# Altium PCB Board4layer.PcbDoc (part 1 of 2)
Units mm, origin at the board's own origin, x right, y up, seen from the top; angles counter-clockwise.
Board outline 136 x 96 mm, 4 copper layers (Top Layer, Int1 (GND), Int2 (PWR), Bottom Layer), stack 1.369 mm thick; 242 components, 241 nets, 1041 pads, 277 vias.
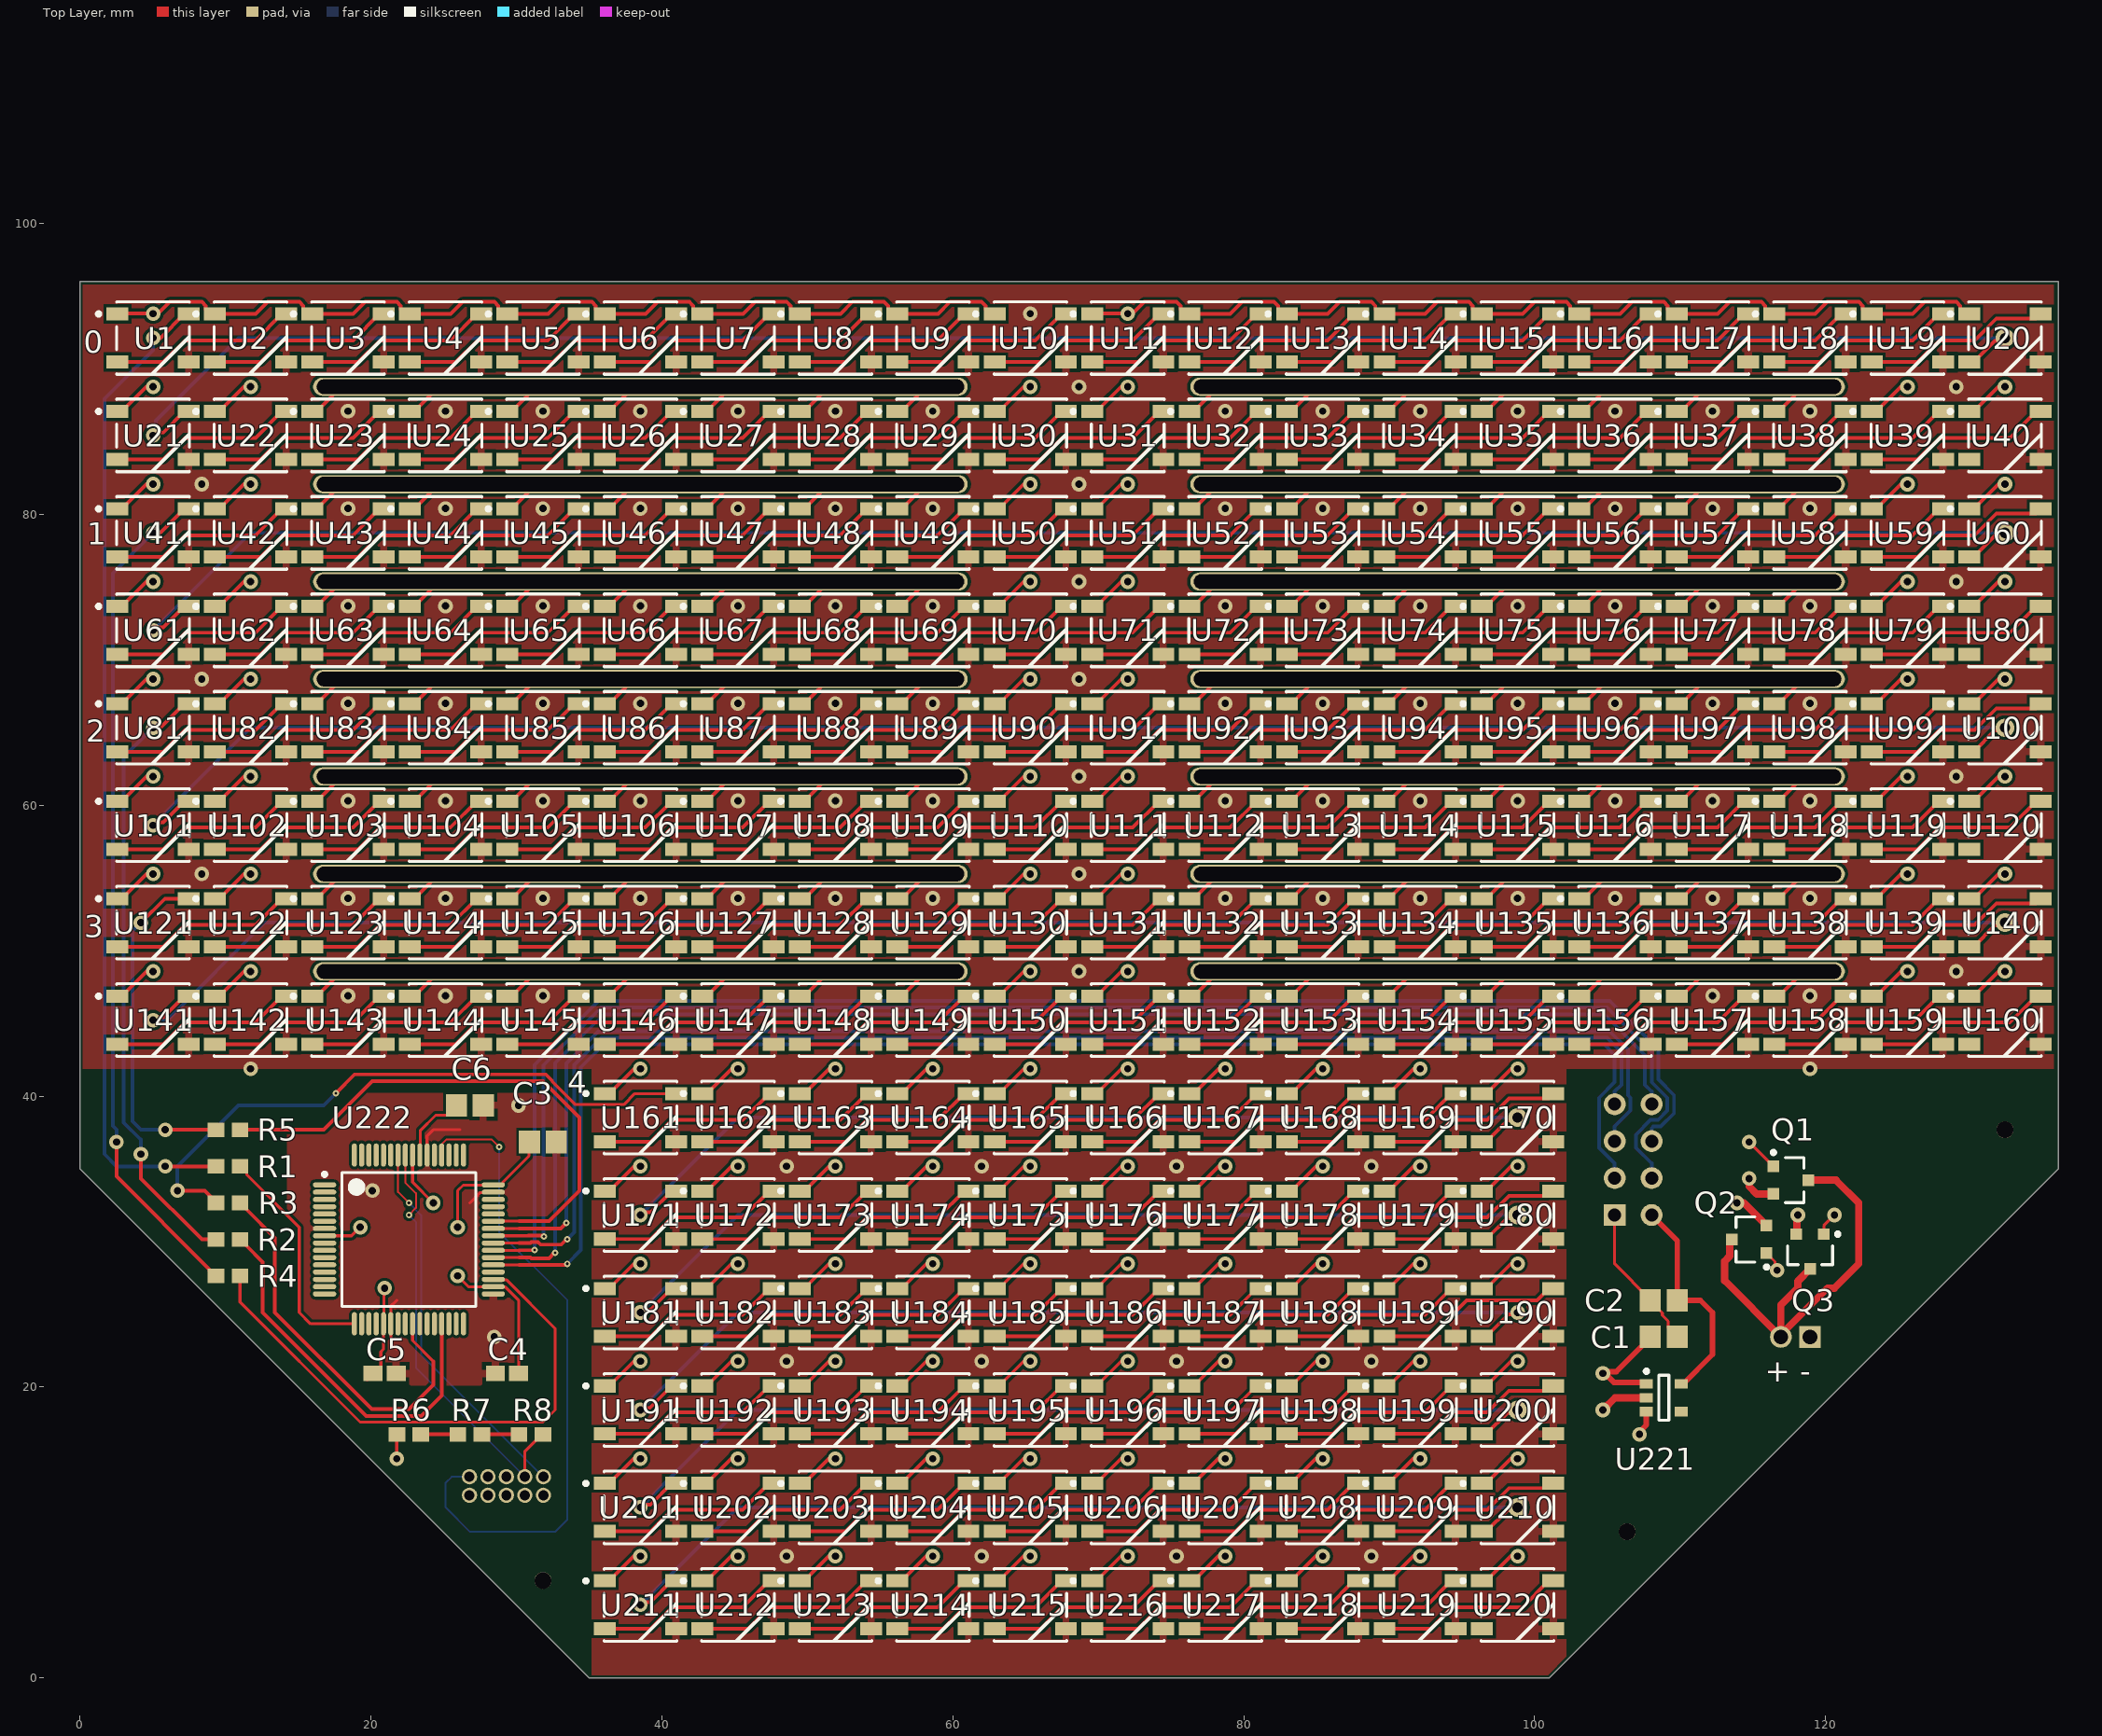
[diagram p0: Top Layer view]
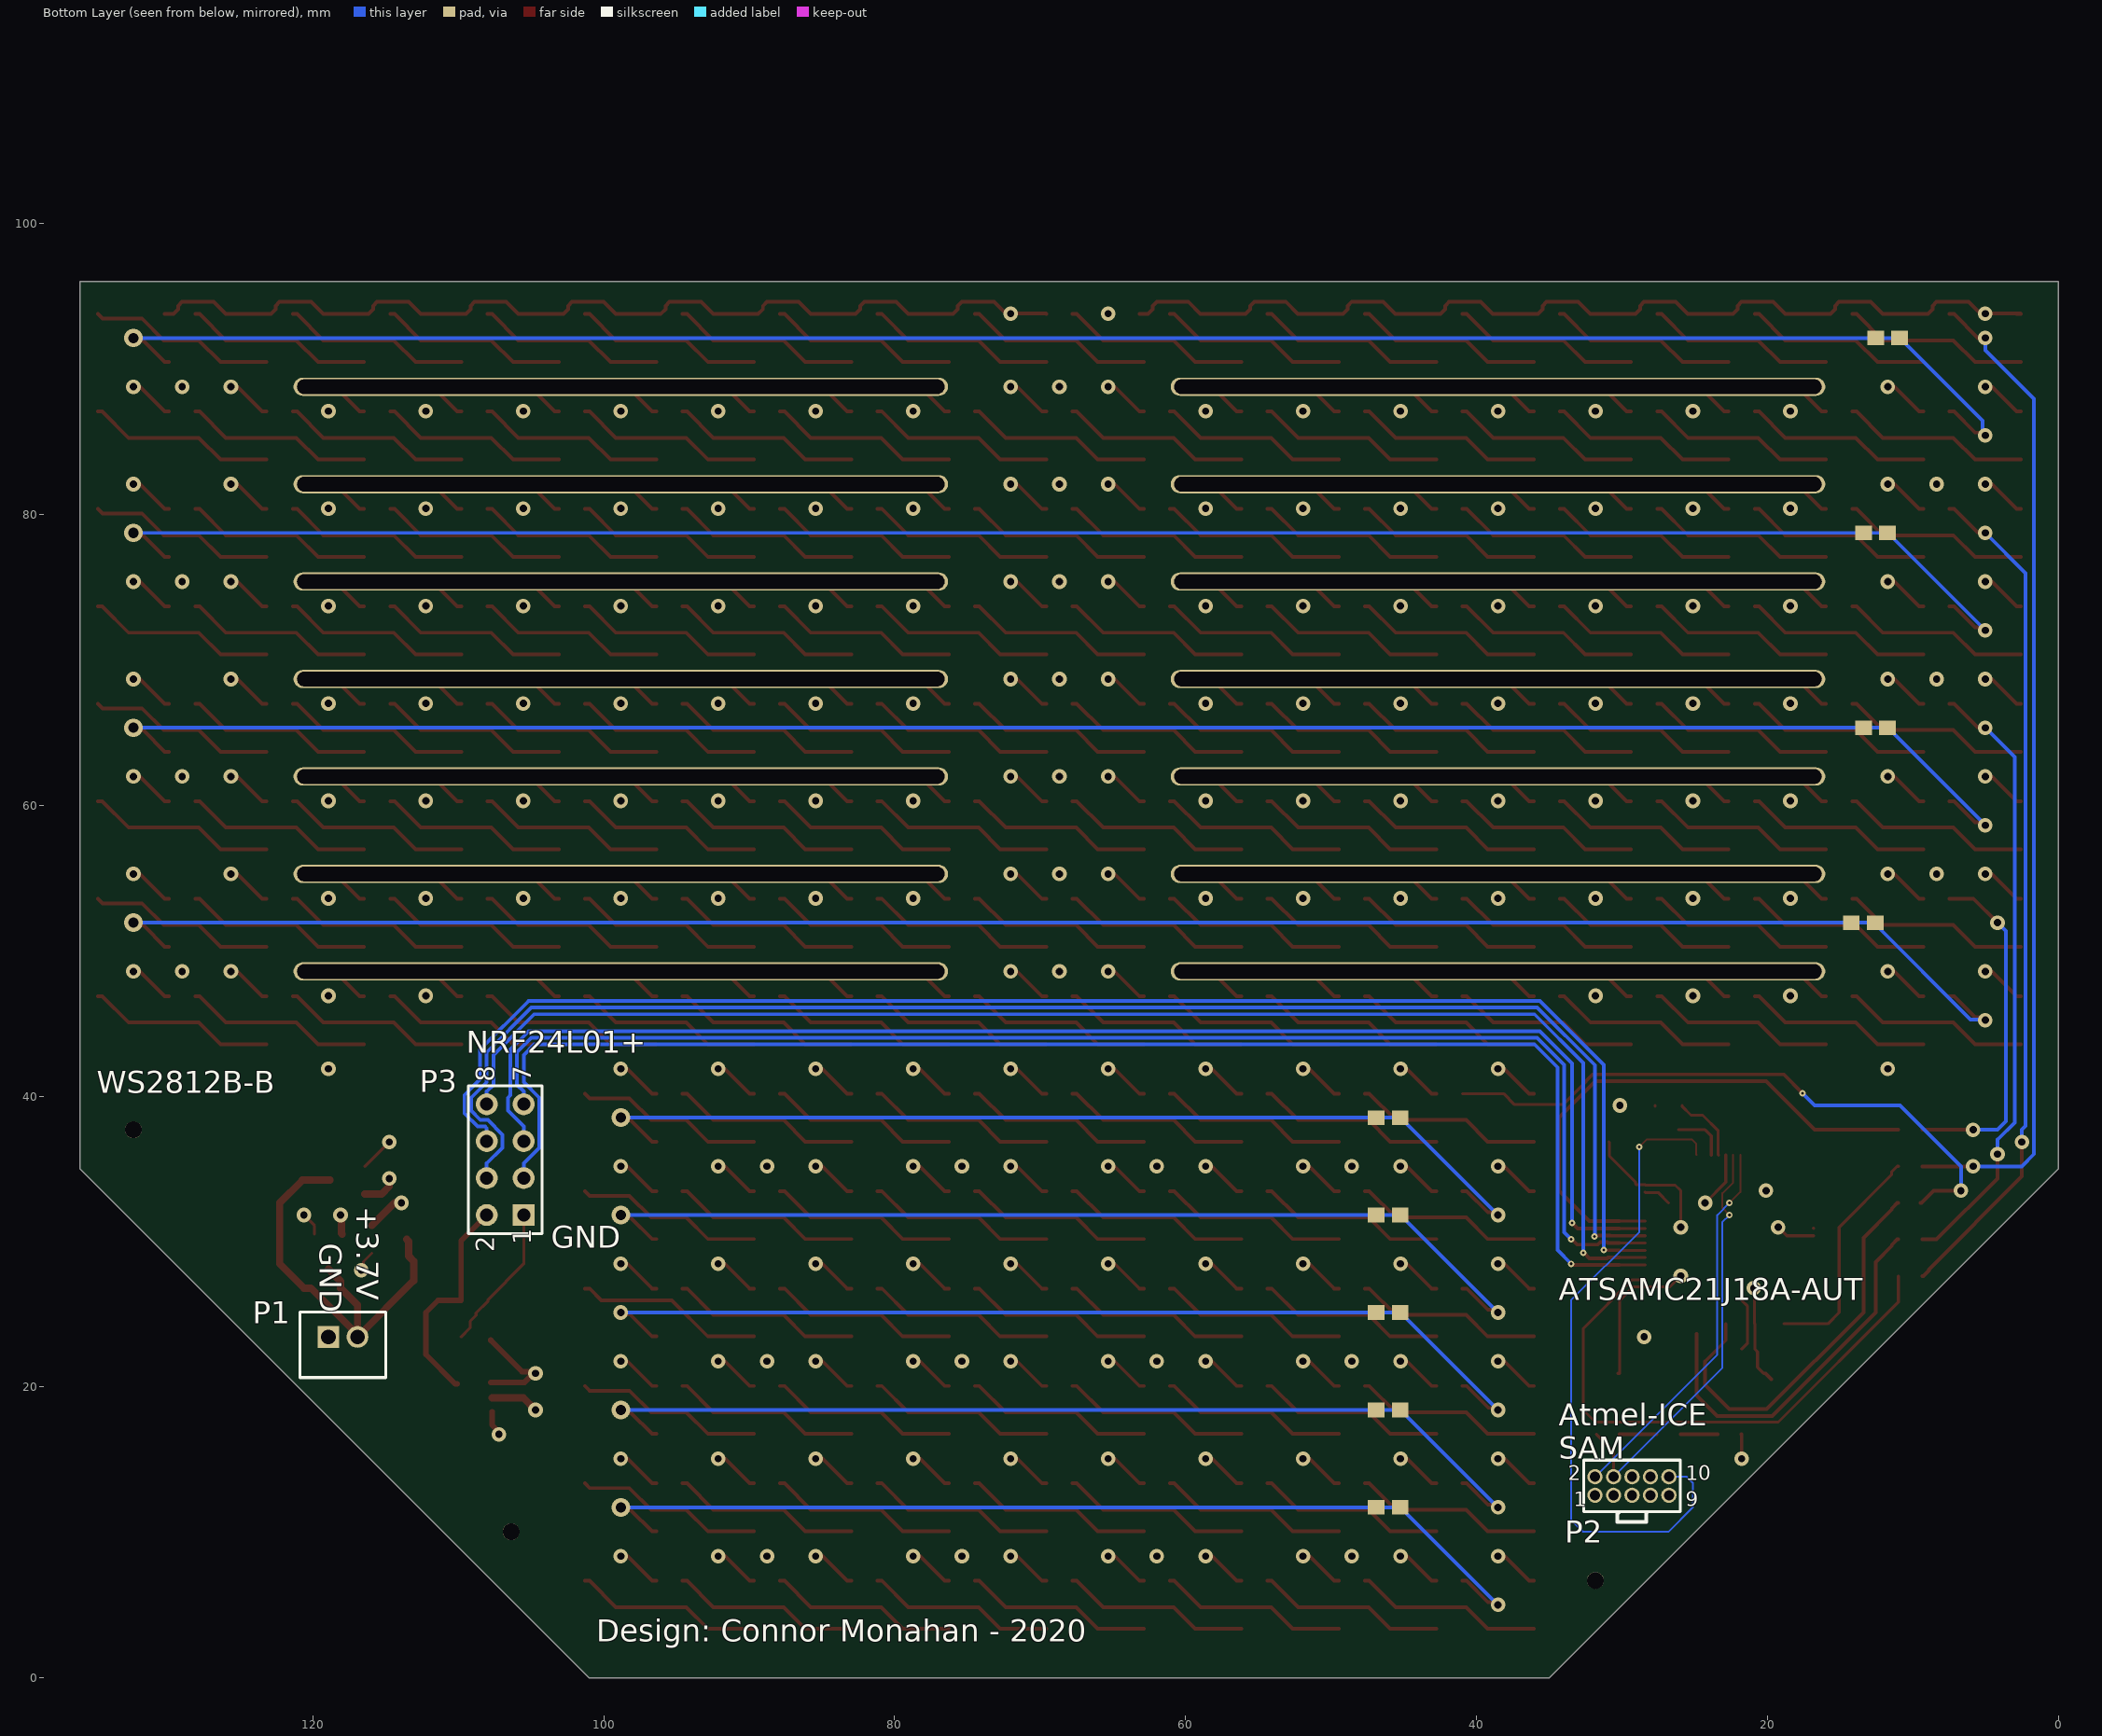
[diagram p1: Bottom Layer view, seen from below]
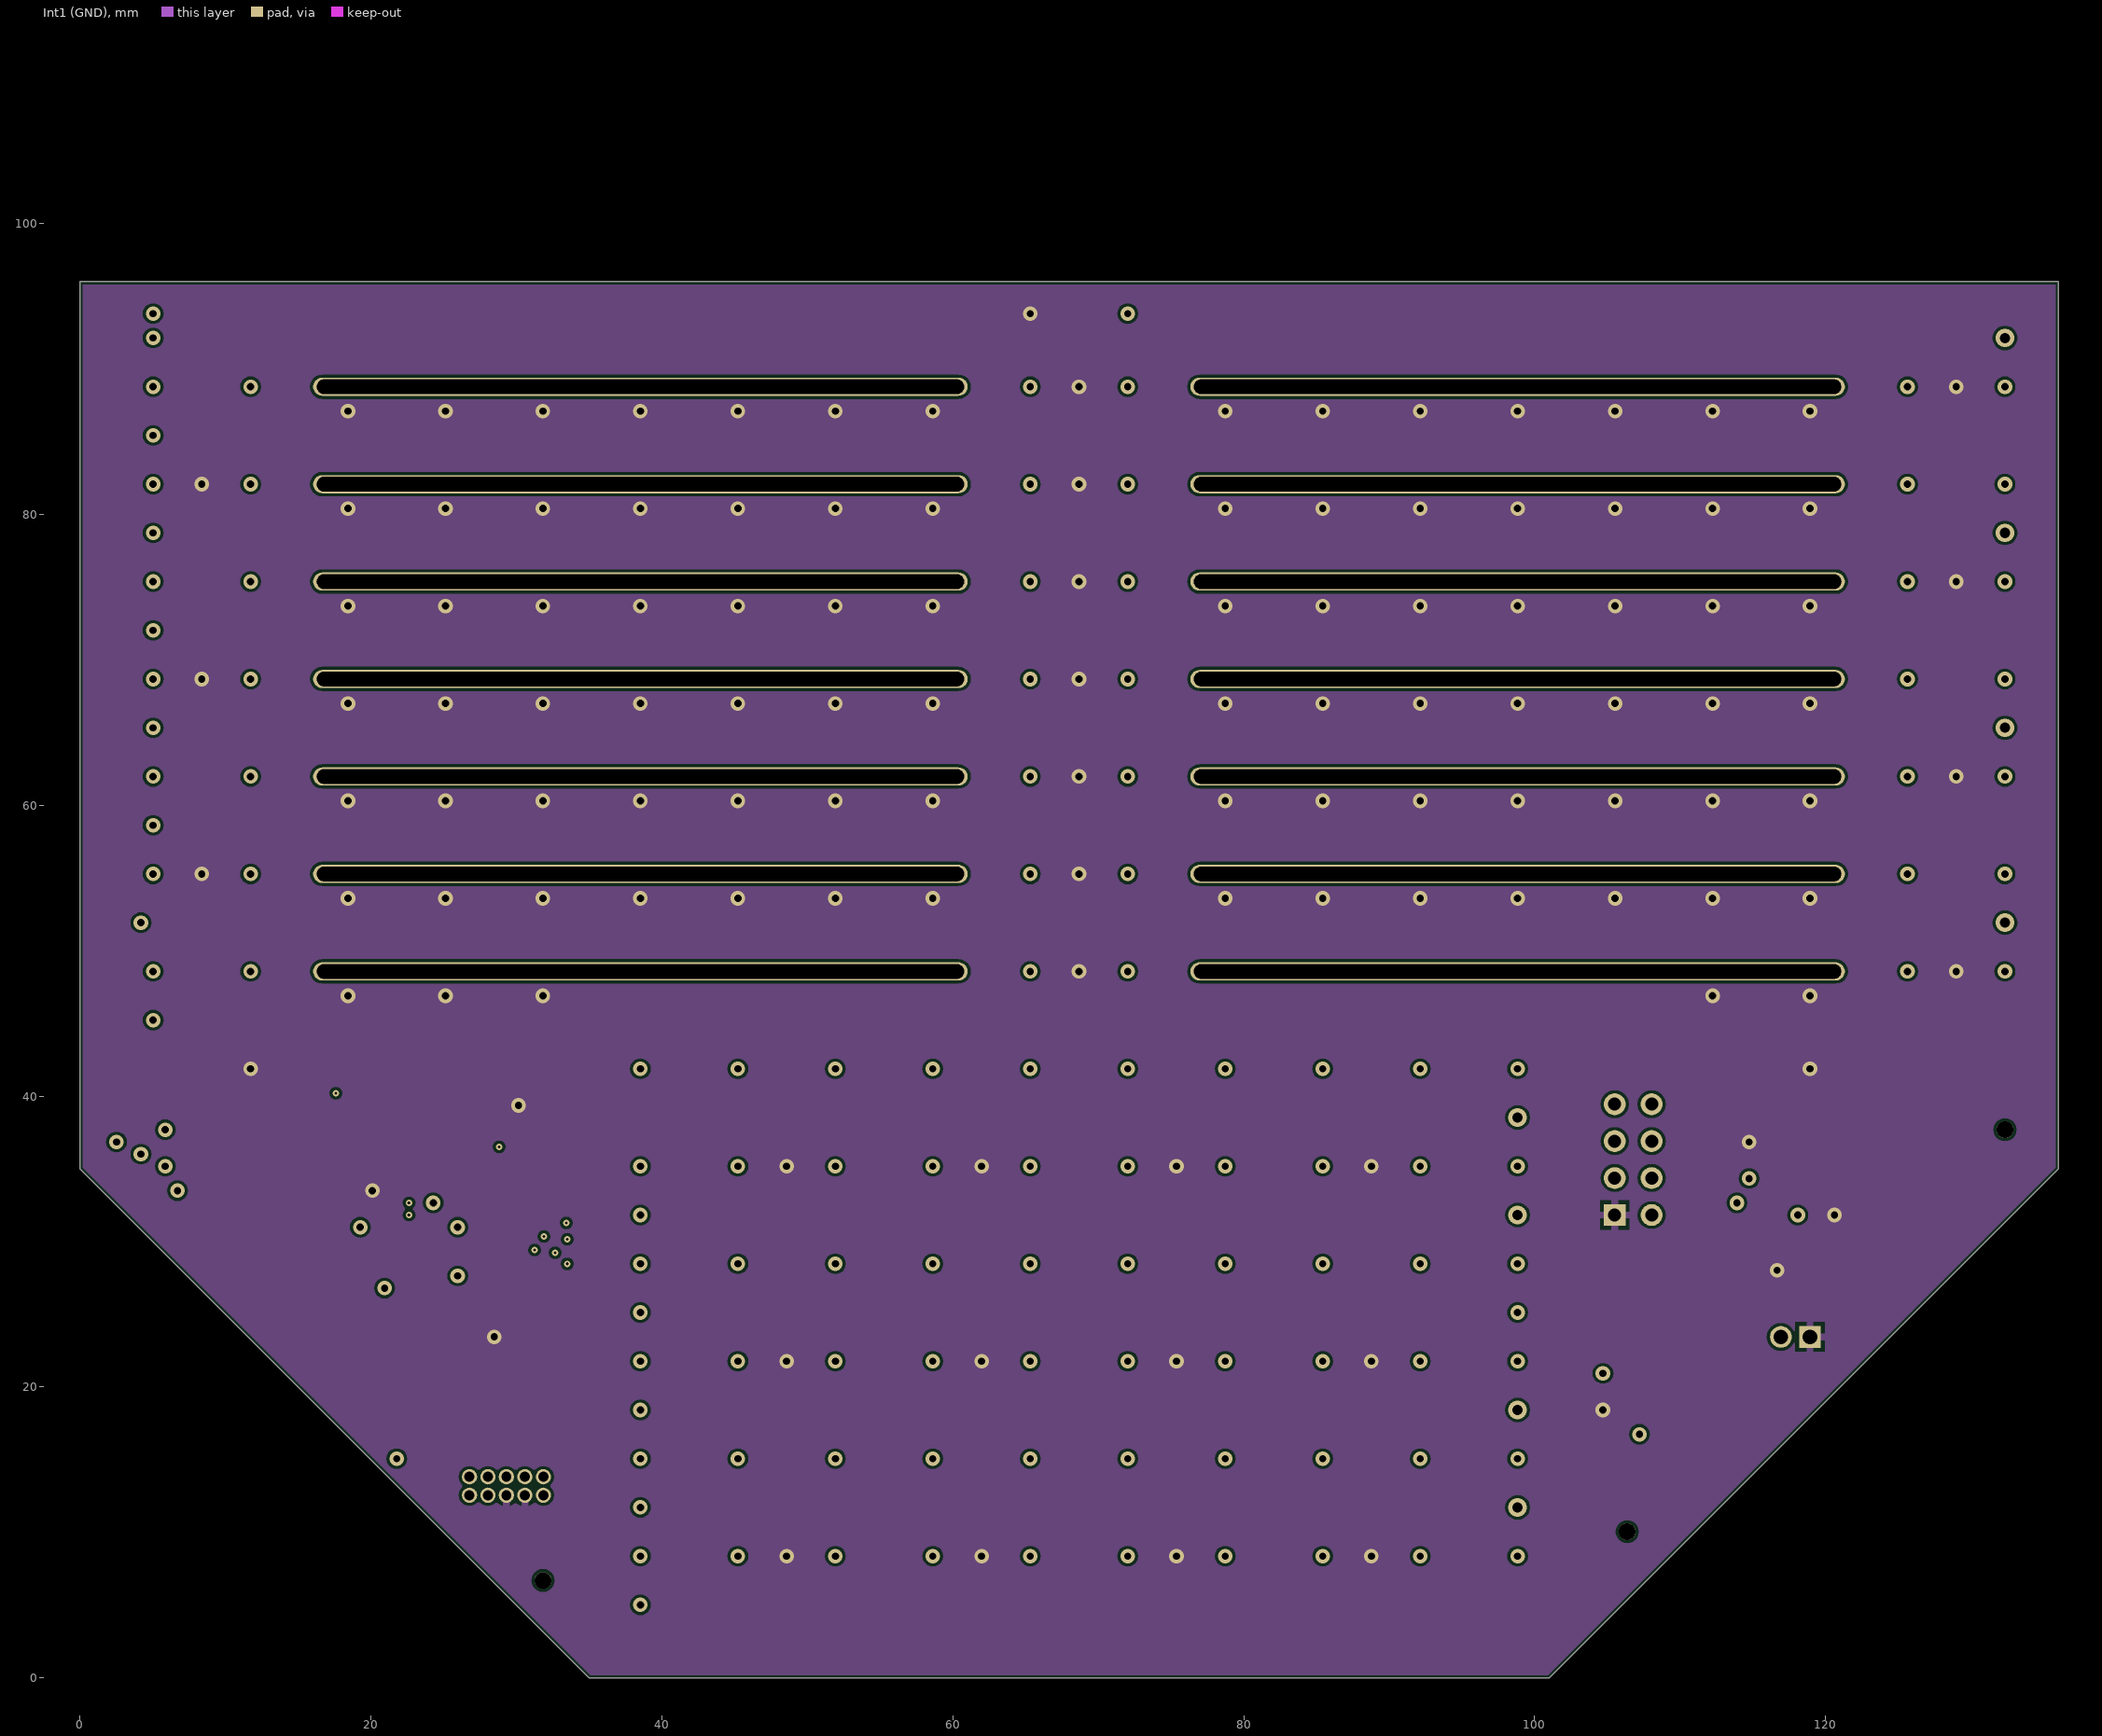
[diagram p2: Int1 (GND)]
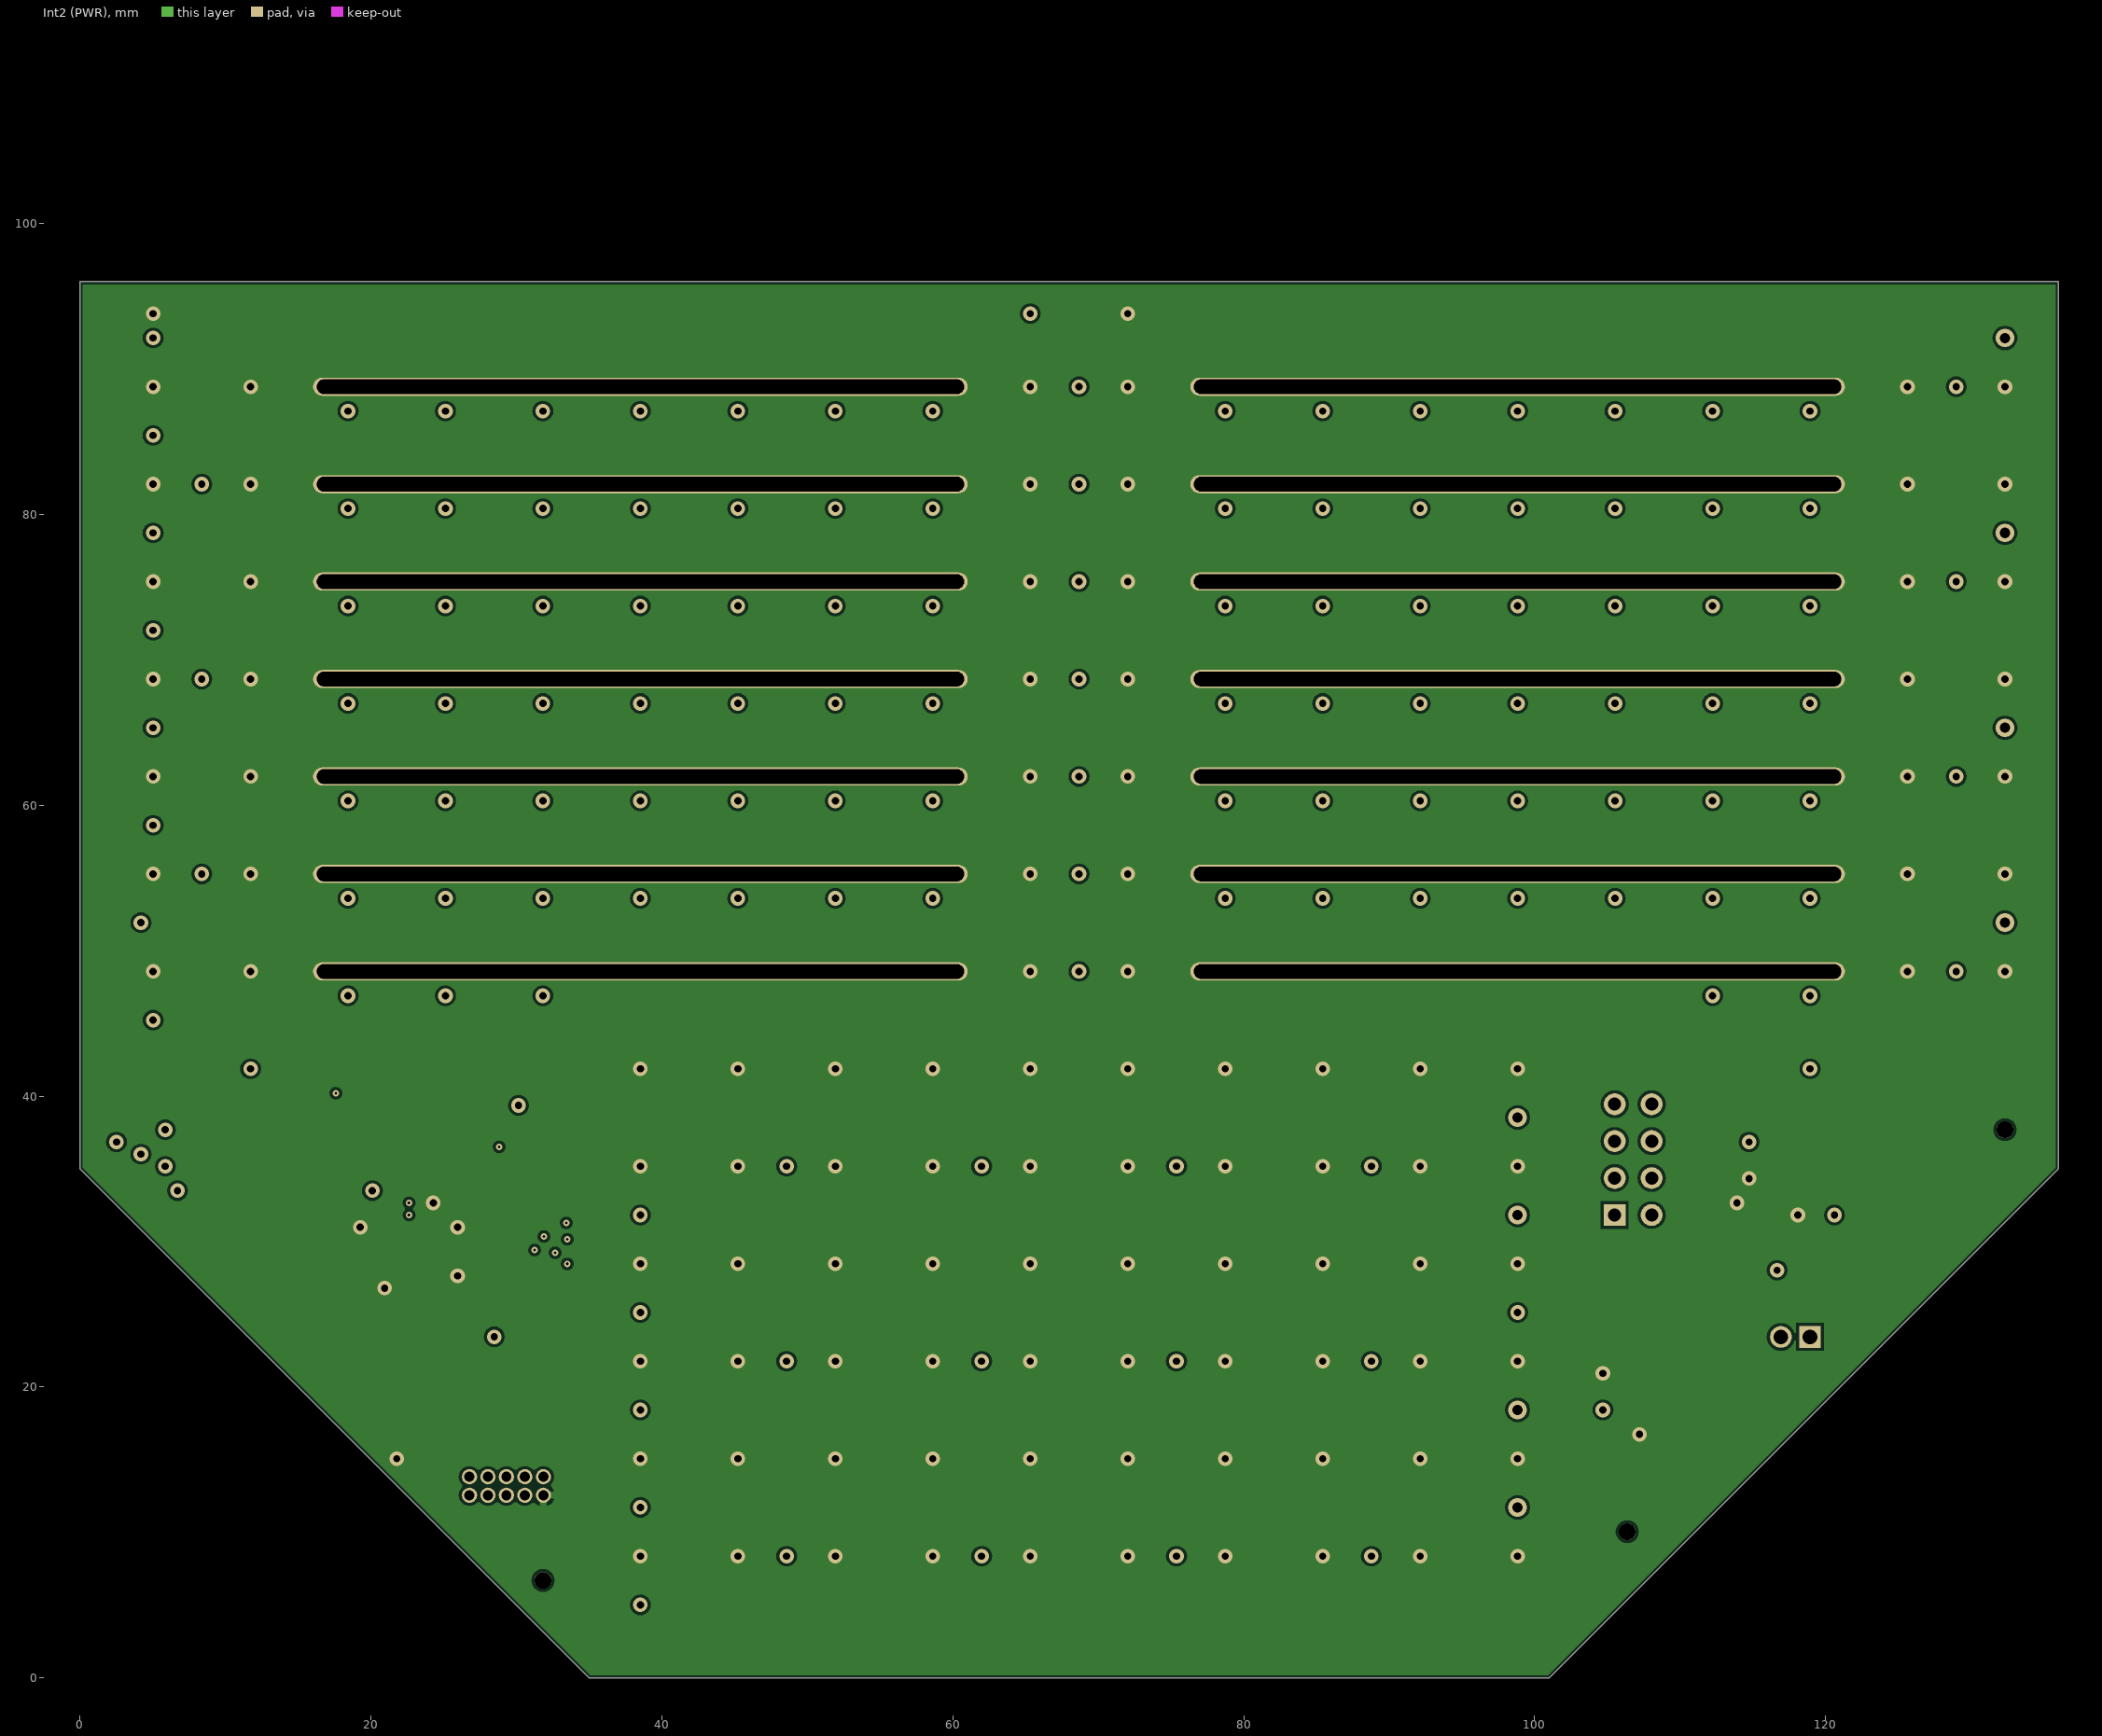
[diagram p3: Int2 (PWR)]
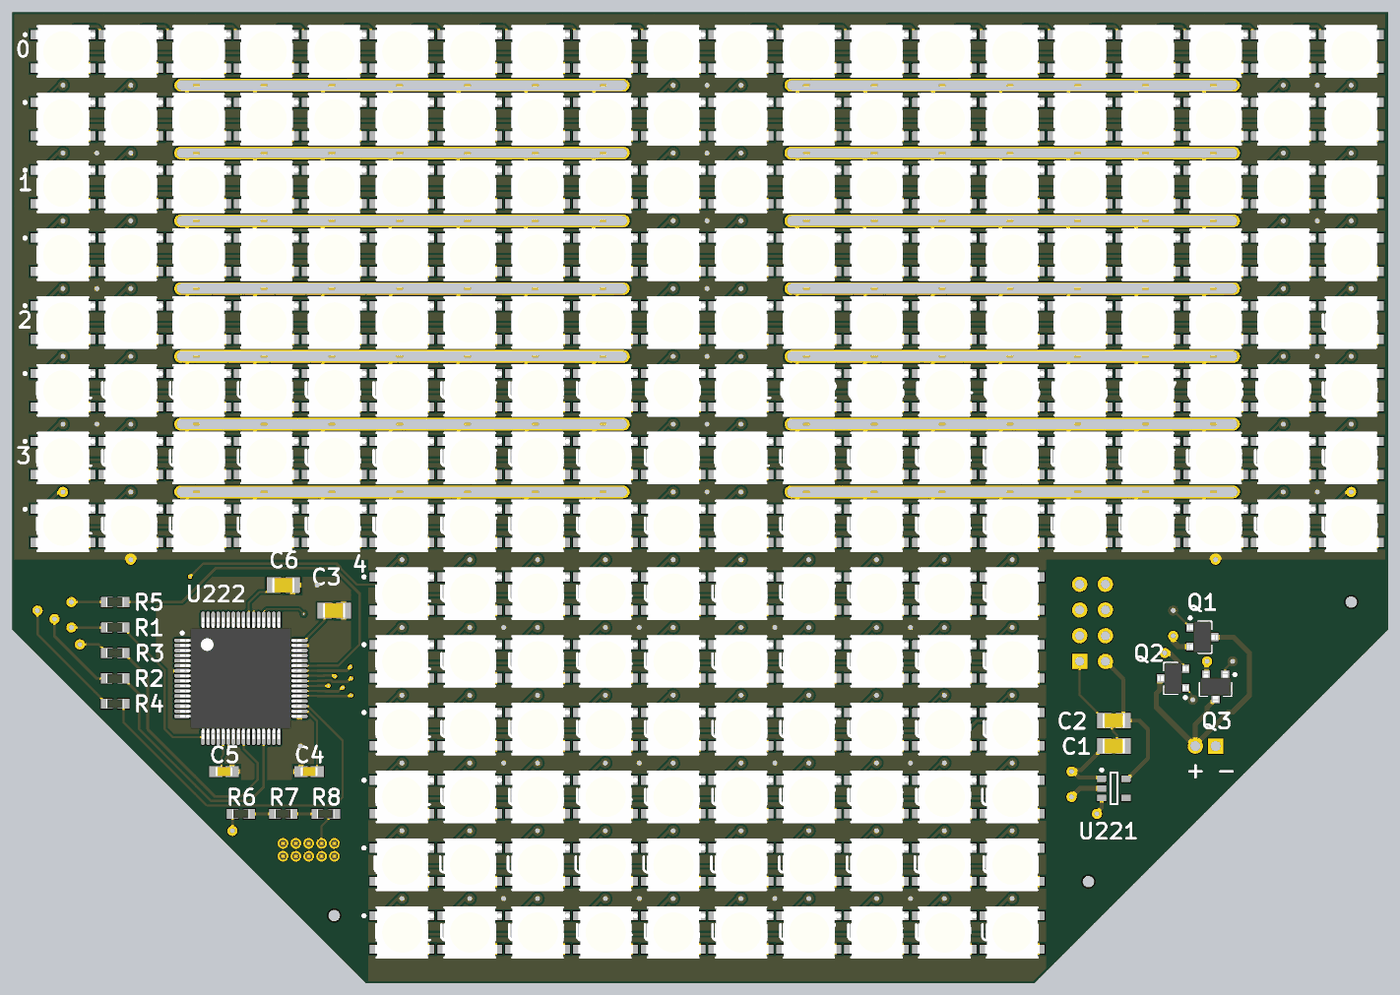
[diagram p5: 3D render of the assembled board from above, using the file's embedded part models]

## Layer stack, top to bottom
Top Solder: solder mask 0.0254, SM-001, Dk 4
Top Layer: signal copper 0.035
Dielectric 1: prepreg 0.1295, PP-017, Dk 4.3
Dielectric 2: prepreg 0.1295, PP-017, Dk 4.3
Int1 (GND): signal copper 0.035
Dielectric 3: core 0.7112, Core-039, Dk 4.8
Int2 (PWR): signal copper 0.035
Dielectric 4: prepreg 0.1295, PP-017, Dk 4.3
Dielectric 5: prepreg 0.1295, PP-017, Dk 4.3
Bottom Layer: signal copper 0.035
Bottom Solder: solder mask 0.0254, SM-001, Dk 4

## Board outline
0,96 136,96 136,35 101,0 35,0 0,35

## Design rules (kind name [scope] priority, off if disabled: settings)
BoardOutlineClearance [All] p1: gap=0.2 ignorepadtopadclearanceinfootprint=FALSE except(0.4: Arc-SplitBarrior Arc-SplitContinuation Track-SplitBarrior Track-SplitContinuation SMDPad-SplitBarrior SMDPad-SplitContinuation THPad-SplitBarrior THPad-SplitContinuation Via-SplitBarrior Via-SplitContinuation Fill-SplitBarrior Fill-SplitContinuation Poly-SplitBarrior Poly-SplitContinuation Region-SplitBarrior Region-SplitContinuation Text-SplitBarrior Text-SplitContinuation)
Clearance "Clearance Bottom Layer" [OnLayer('Bottom Layer')] p1: gap=0.203 ignorepadtopadclearanceinfootprint=TRUE except(0.254: Arc-Text Track-Text SMDPad-Text THPad-Text Via-Text Fill-Text Poly-Text Region-Text Text-Text)
Clearance "Clearance Top Layer" [OnLayer('Top Layer')] p2: gap=0.203 ignorepadtopadclearanceinfootprint=TRUE except(0.254: Arc-Text Track-Text SMDPad-Text THPad-Text Via-Text Fill-Text Poly-Text Region-Text Text-Text)
Clearance [All] p3: gap=0.2 ignorepadtopadclearanceinfootprint=FALSE except(0.089: Arc-Arc Arc-Track Arc-SMDPad Track-Track Track-SMDPad SMDPad-SMDPad; 0.127: Arc-Via Track-Via SMDPad-Via THPad-Via Via-Via; 0.254: Arc-Text Track-Text SMDPad-Text THPad-Text Via-Text Fill-Text Poly-Text Region-Text Text-Text)
HoleSize [All] p1: absolutevalues=TRUE maxlimit=6.3 minlimit=0.2 maxpercent=80.000 minpercent=20.000
MinimumAnnularRing [All] p1: minimumring=0.076
MinimumSolderMaskSliver [All] p1: minsoldermaskwidth=0.05
PolygonConnect PolygonConnect_1 [All] p1: thpad.connectstyle=Relief thpad.reliefconductorwidth=0.508 thpad.reliefentries=4 thpad.polygonreliefangle="90 Angle" thpad.airgapwidth=0.254 smdpad.connectstyle=Relief smdpad.reliefconductorwidth=0.508 smdpad.reliefentries=4 smdpad.polygonreliefangle="90 Angle" smdpad.airgapwidth=0.254 via.connectstyle=Direct via.reliefconductorwidth=0.508 via.reliefentries=4 via.polygonreliefangle="90 Angle" via.airgapwidth=0.254
RoomDefinition Power [InComponentClass('Power')] p1: confinementstyle=ConfineIn formatcopy=TRUE lockcomponents=FALSE outline 102.279,3.35 146.562,3.35 146.562,42.871 102.279,42.871
RoomDefinition MCU [InComponentClass('MCU')] p2: confinementstyle=ConfineIn formatcopy=TRUE lockcomponents=FALSE outline 0,0 35.175,0 35.175,42.713 0,42.713
RoomDefinition LEDs [InComponentClass('LEDs')] p3: confinementstyle=ConfineIn formatcopy=TRUE lockcomponents=FALSE outline 0,0 143.212,0 143.212,95.475 0,95.475
RoutingCorners [All] p1: cornerstyle=Round minsetback=2.54 maxsetback=2.54
RoutingVias [All] p1: holewidth=0.5 width=1 viastyle="Through Hole" minholewidth=0.2 minwidth=0.45 maxholewidth=1 maxwidth=2
SilkToSilkClearance [All] p1: silktosilkclearance=0.1
SilkToSolderMaskClearance [IsPad] p1: minsilkscreentomaskgap=0.1 clearancetoexposedcopper=TRUE
SolderMaskExpansion [All] p1: expansion=0.104 istentingtop=FALSE
Width [All] p1: maxlimit=2.54 minlimit=0.089 preferedwidth=0.381
25 further rules are at their usual default settings.

## Classes and differential pairs
component class Power: C1 C2 P1 P3 Q1 Q2 Q3 U221
component class MCU: C3 C4 C5 C6 P2 R1 R2 R3 R4 R5 R6 R7 R8 U222
component class LEDs: U1 U2 U3 U4 U5 U6 U7 U8 U9 U10 U11 U12 U13 U14 U15 U16 U17 U18 U19 U20 U21 U22 U23 U24 U25 U26 U27 U28 U29 U30 U31 U32 U33 U34 U35 U36 U37 U38 U39 U40 U41 U42 U43 U44 U45 U46 U47 U48 U49 U50 U51 U52 U53 U54 U55 U56 U57 U58 U59 U60 U61 U62 U63 U64 U65 U66 U67 U68 U69 U70 U71 U72 U73 U74 U75 U76 U77 U78 U79 U80 U81 U82 U83 U84 U85 U86 U87 U88 U89 U90 U91 U92 U93 U94 U95 U96 U97 U98 U99 U100 U101 U102 U103 U104 U105 U106 U107 U108 U109 U110 U111 U112 U113 U114 U115 U116 U117 U118 U119 U120 U121 U122 U123 U124 U125 U126 U127 U128 U129 U130 U131 U132 U133 U134 U135 U136 U137 U138 U139 U140 U141 U142 U143 U144 U145 U146 U147 U148 U149 U150 U151 U152 U153 U154 U155 U156 U157 U158 U159 U160 U161 U162 U163 U164 U165 U166 U167 U168 U169 U170 U171 U172 U173 U174 U175 U176 U177 U178 U179 U180 U181 U182 U183 U184 U185 U186 U187 U188 U189 U190 U191 U192 U193 U194 U195 U196 U197 U198 U199 U200 U201 U202 U203 U204 U205 U206 U207 U208 U209 U210 U211 U212 U213 U214 U215 U216 U217 U218 U219 U220

## Components (designator, comment, footprint, x,y, rotation, side; value= is the part's Value field where it differs from the comment)
C1 "1uF" CAPC2012X14M 108.875,23.45 r0 top
C2 "1uF" CAPC2012X14M 108.875,25.963 r180 top
C3 "10uF" CAPC2012X14M 31.825,36.85 r0 top
C4 "100nF" CAPC1608X09M 29.35,20.937 r180 top
C5 "100nF" CAPC1608X09M 20.937,20.937 r0 top
C6 "1uF" CAPC2012X14M 26.8,39.362 r0 top
P1 "B2B-PH-K-S(LF)(SN)" JST-B2B-PH-K-S_V 117.925,22.9 r180 bottom
P2 "62201021121" 62201021121 29.312,13.197 r180 bottom
P3 "Header 4X2" HDR2X4 105.498,31.825 r90 bottom
Q1 "AO3401A" AO-SOT-23-3L_V 117.613,34.225 r0 top
Q2 "AO3401A" AO-SOT-23-3L_V 114.737,30.15 r180 top
Q3 "AO3401A" AO-SOT-23-3L_V 118.925,29.312 r270 top
R1 "330R" RESC1608X06M 10.177,35.175 r0 top
R2 "330R" RESC1608X06M 10.177,30.15 r0 top
R3 "330R" RESC1608X06M 10.177,32.663 r180 top
R4 "330R" RESC1608X06M 10.177,27.637 r0 top
R5 "330R" RESC1608X06M 10.177,37.687 r0 top
R6 "330R" RESC1608X06M 22.612,16.75 r0 top
R7 "330R" RESC1608X06M 26.8,16.75 r0 top
R8 "330R" RESC1608X06M 31,16.75 r0 top
U1 "WS2812B" LED5050 5.025,92.125 r0 top
U2 "WS2812B" LED5050 11.725,92.125 r0 top
U3 "WS2812B" LED5050 18.425,92.125 r0 top
U4 "WS2812B" LED5050 25.125,92.125 r0 top
U5 "WS2812B" LED5050 31.825,92.125 r0 top
U6 "WS2812B" LED5050 38.525,92.125 r0 top
U7 "WS2812B" LED5050 45.225,92.125 r0 top
U8 "WS2812B" LED5050 51.925,92.125 r0 top
U9 "WS2812B" LED5050 58.625,92.125 r0 top
U10 "WS2812B" LED5050 65.325,92.125 r0 top
U11 "WS2812B" LED5050 72.025,92.125 r0 top
U12 "WS2812B" LED5050 78.725,92.125 r0 top
U13 "WS2812B" LED5050 85.425,92.125 r0 top
U14 "WS2812B" LED5050 92.125,92.125 r0 top
U15 "WS2812B" LED5050 98.825,92.125 r0 top
U16 "WS2812B" LED5050 105.525,92.125 r0 top
U17 "WS2812B" LED5050 112.225,92.125 r0 top
U18 "WS2812B" LED5050 118.925,92.125 r0 top
U19 "WS2812B" LED5050 125.625,92.125 r0 top
U20 "WS2812B" LED5050 132.325,92.125 r0 top
U21 "WS2812B" LED5050 5.025,85.425 r0 top
U22 "WS2812B" LED5050 11.725,85.425 r0 top
U23 "WS2812B" LED5050 18.425,85.425 r0 top
U24 "WS2812B" LED5050 25.125,85.425 r0 top
U25 "WS2812B" LED5050 31.825,85.425 r0 top
U26 "WS2812B" LED5050 38.525,85.425 r0 top
U27 "WS2812B" LED5050 45.225,85.425 r0 top
U28 "WS2812B" LED5050 51.925,85.425 r0 top
U29 "WS2812B" LED5050 58.625,85.425 r0 top
U30 "WS2812B" LED5050 65.325,85.425 r0 top
U31 "WS2812B" LED5050 72.025,85.425 r0 top
U32 "WS2812B" LED5050 78.725,85.425 r0 top
U33 "WS2812B" LED5050 85.425,85.425 r0 top
U34 "WS2812B" LED5050 92.125,85.425 r0 top
U35 "WS2812B" LED5050 98.825,85.425 r0 top
U36 "WS2812B" LED5050 105.525,85.425 r0 top
U37 "WS2812B" LED5050 112.225,85.425 r0 top
U38 "WS2812B" LED5050 118.925,85.425 r0 top
U39 "WS2812B" LED5050 125.625,85.425 r0 top
U40 "WS2812B" LED5050 132.325,85.425 r0 top
U41 "WS2812B" LED5050 5.025,78.725 r0 top
U42 "WS2812B" LED5050 11.725,78.725 r0 top
U43 "WS2812B" LED5050 18.425,78.725 r0 top
U44 "WS2812B" LED5050 25.125,78.725 r0 top
U45 "WS2812B" LED5050 31.825,78.725 r0 top
U46 "WS2812B" LED5050 38.525,78.725 r0 top
U47 "WS2812B" LED5050 45.225,78.725 r0 top
U48 "WS2812B" LED5050 51.925,78.725 r0 top
U49 "WS2812B" LED5050 58.625,78.725 r0 top
U50 "WS2812B" LED5050 65.325,78.725 r0 top
U51 "WS2812B" LED5050 72.025,78.725 r0 top
U52 "WS2812B" LED5050 78.725,78.725 r0 top
U53 "WS2812B" LED5050 85.425,78.725 r0 top
U54 "WS2812B" LED5050 92.125,78.725 r0 top
U55 "WS2812B" LED5050 98.825,78.725 r0 top
U56 "WS2812B" LED5050 105.525,78.725 r0 top
U57 "WS2812B" LED5050 112.225,78.725 r0 top
U58 "WS2812B" LED5050 118.925,78.725 r0 top
U59 "WS2812B" LED5050 125.625,78.725 r0 top
U60 "WS2812B" LED5050 132.325,78.725 r0 top
U61 "WS2812B" LED5050 5.025,72.025 r0 top
U62 "WS2812B" LED5050 11.725,72.025 r0 top
U63 "WS2812B" LED5050 18.425,72.025 r0 top
U64 "WS2812B" LED5050 25.125,72.025 r0 top
U65 "WS2812B" LED5050 31.825,72.025 r0 top
U66 "WS2812B" LED5050 38.525,72.025 r0 top
U67 "WS2812B" LED5050 45.225,72.025 r0 top
U68 "WS2812B" LED5050 51.925,72.025 r0 top
U69 "WS2812B" LED5050 58.625,72.025 r0 top
U70 "WS2812B" LED5050 65.325,72.025 r0 top
U71 "WS2812B" LED5050 72.025,72.025 r0 top
U72 "WS2812B" LED5050 78.725,72.025 r0 top
U73 "WS2812B" LED5050 85.425,72.025 r0 top
U74 "WS2812B" LED5050 92.125,72.025 r0 top
U75 "WS2812B" LED5050 98.825,72.025 r0 top
U76 "WS2812B" LED5050 105.525,72.025 r0 top
U77 "WS2812B" LED5050 112.225,72.025 r0 top
U78 "WS2812B" LED5050 118.925,72.025 r0 top
U79 "WS2812B" LED5050 125.625,72.025 r0 top
U80 "WS2812B" LED5050 132.325,72.025 r0 top
U81 "WS2812B" LED5050 5.025,65.325 r0 top
U82 "WS2812B" LED5050 11.725,65.325 r0 top
U83 "WS2812B" LED5050 18.425,65.325 r0 top
U84 "WS2812B" LED5050 25.125,65.325 r0 top
U85 "WS2812B" LED5050 31.825,65.325 r0 top
U86 "WS2812B" LED5050 38.525,65.325 r0 top
U87 "WS2812B" LED5050 45.225,65.325 r0 top
U88 "WS2812B" LED5050 51.925,65.325 r0 top
U89 "WS2812B" LED5050 58.625,65.325 r0 top
U90 "WS2812B" LED5050 65.325,65.325 r0 top
U91 "WS2812B" LED5050 72.025,65.325 r0 top
U92 "WS2812B" LED5050 78.725,65.325 r0 top
U93 "WS2812B" LED5050 85.425,65.325 r0 top
U94 "WS2812B" LED5050 92.125,65.325 r0 top
U95 "WS2812B" LED5050 98.825,65.325 r0 top
U96 "WS2812B" LED5050 105.525,65.325 r0 top
U97 "WS2812B" LED5050 112.225,65.325 r0 top
U98 "WS2812B" LED5050 118.925,65.325 r0 top
U99 "WS2812B" LED5050 125.625,65.325 r0 top
U100 "WS2812B" LED5050 132.325,65.325 r0 top
U101 "WS2812B" LED5050 5.025,58.625 r0 top
U102 "WS2812B" LED5050 11.725,58.625 r0 top
U103 "WS2812B" LED5050 18.425,58.625 r0 top
U104 "WS2812B" LED5050 25.125,58.625 r0 top
U105 "WS2812B" LED5050 31.825,58.625 r0 top
U106 "WS2812B" LED5050 38.525,58.625 r0 top
U107 "WS2812B" LED5050 45.225,58.625 r0 top
U108 "WS2812B" LED5050 51.925,58.625 r0 top
U109 "WS2812B" LED5050 58.625,58.625 r0 top
U110 "WS2812B" LED5050 65.325,58.625 r0 top
U111 "WS2812B" LED5050 72.025,58.625 r0 top
U112 "WS2812B" LED5050 78.725,58.625 r0 top
U113 "WS2812B" LED5050 85.425,58.625 r0 top
U114 "WS2812B" LED5050 92.125,58.625 r0 top
U115 "WS2812B" LED5050 98.825,58.625 r0 top
U116 "WS2812B" LED5050 105.525,58.625 r0 top
U117 "WS2812B" LED5050 112.225,58.625 r0 top
U118 "WS2812B" LED5050 118.925,58.625 r0 top
U119 "WS2812B" LED5050 125.625,58.625 r0 top
U120 "WS2812B" LED5050 132.325,58.625 r0 top
U121 "WS2812B" LED5050 5.025,51.925 r0 top
U122 "WS2812B" LED5050 11.725,51.925 r0 top
U123 "WS2812B" LED5050 18.425,51.925 r0 top
U124 "WS2812B" LED5050 25.125,51.925 r0 top
U125 "WS2812B" LED5050 31.825,51.925 r0 top
U126 "WS2812B" LED5050 38.525,51.925 r0 top
U127 "WS2812B" LED5050 45.225,51.925 r0 top
U128 "WS2812B" LED5050 51.925,51.925 r0 top
U129 "WS2812B" LED5050 58.625,51.925 r0 top
U130 "WS2812B" LED5050 65.325,51.925 r0 top
U131 "WS2812B" LED5050 72.025,51.925 r0 top
U132 "WS2812B" LED5050 78.725,51.925 r0 top
U133 "WS2812B" LED5050 85.425,51.925 r0 top
U134 "WS2812B" LED5050 92.125,51.925 r0 top
U135 "WS2812B" LED5050 98.825,51.925 r0 top
U136 "WS2812B" LED5050 105.525,51.925 r0 top
U137 "WS2812B" LED5050 112.225,51.925 r0 top
U138 "WS2812B" LED5050 118.925,51.925 r0 top
U139 "WS2812B" LED5050 125.625,51.925 r0 top
U140 "WS2812B" LED5050 132.325,51.925 r0 top
U141 "WS2812B" LED5050 5.025,45.225 r0 top
U142 "WS2812B" LED5050 11.725,45.225 r0 top
U143 "WS2812B" LED5050 18.425,45.225 r0 top
U144 "WS2812B" LED5050 25.125,45.225 r0 top
U145 "WS2812B" LED5050 31.825,45.225 r0 top
U146 "WS2812B" LED5050 38.525,45.225 r0 top
U147 "WS2812B" LED5050 45.225,45.225 r0 top
U148 "WS2812B" LED5050 51.925,45.225 r0 top
U149 "WS2812B" LED5050 58.625,45.225 r0 top
U150 "WS2812B" LED5050 65.325,45.225 r0 top
U151 "WS2812B" LED5050 72.025,45.225 r0 top
U152 "WS2812B" LED5050 78.725,45.225 r0 top
U153 "WS2812B" LED5050 85.425,45.225 r0 top
U154 "WS2812B" LED5050 92.125,45.225 r0 top
U155 "WS2812B" LED5050 98.825,45.225 r0 top
U156 "WS2812B" LED5050 105.525,45.225 r0 top
U157 "WS2812B" LED5050 112.225,45.225 r0 top
U158 "WS2812B" LED5050 118.925,45.225 r0 top
U159 "WS2812B" LED5050 125.625,45.225 r0 top
U160 "WS2812B" LED5050 132.325,45.225 r0 top
U161 "WS2812B" LED5050 38.525,38.525 r0 top
U162 "WS2812B" LED5050 45.225,38.525 r0 top
U163 "WS2812B" LED5050 51.925,38.525 r0 top
U164 "WS2812B" LED5050 58.625,38.525 r0 top
U165 "WS2812B" LED5050 65.325,38.525 r0 top
U166 "WS2812B" LED5050 72.025,38.525 r0 top
U167 "WS2812B" LED5050 78.725,38.525 r0 top
U168 "WS2812B" LED5050 85.425,38.525 r0 top
U169 "WS2812B" LED5050 92.125,38.525 r0 top
U170 "WS2812B" LED5050 98.825,38.525 r0 top
U171 "WS2812B" LED5050 38.525,31.825 r0 top
U172 "WS2812B" LED5050 45.225,31.825 r0 top
U173 "WS2812B" LED5050 51.925,31.825 r0 top
U174 "WS2812B" LED5050 58.625,31.825 r0 top
U175 "WS2812B" LED5050 65.325,31.825 r0 top
U176 "WS2812B" LED5050 72.025,31.825 r0 top
U177 "WS2812B" LED5050 78.725,31.825 r0 top
U178 "WS2812B" LED5050 85.425,31.825 r0 top
U179 "WS2812B" LED5050 92.125,31.825 r0 top
U180 "WS2812B" LED5050 98.825,31.825 r0 top
U181 "WS2812B" LED5050 38.525,25.125 r0 top
U182 "WS2812B" LED5050 45.225,25.125 r0 top
U183 "WS2812B" LED5050 51.925,25.125 r0 top
U184 "WS2812B" LED5050 58.625,25.125 r0 top
U185 "WS2812B" LED5050 65.325,25.125 r0 top
U186 "WS2812B" LED5050 72.025,25.125 r0 top
U187 "WS2812B" LED5050 78.725,25.125 r0 top
U188 "WS2812B" LED5050 85.425,25.125 r0 top
U189 "WS2812B" LED5050 92.125,25.125 r0 top
U190 "WS2812B" LED5050 98.825,25.125 r0 top
U191 "WS2812B" LED5050 38.525,18.425 r0 top
U192 "WS2812B" LED5050 45.225,18.425 r0 top
U193 "WS2812B" LED5050 51.925,18.425 r0 top
U194 "WS2812B" LED5050 58.625,18.425 r0 top
U195 "WS2812B" LED5050 65.325,18.425 r0 top
U196 "WS2812B" LED5050 72.025,18.425 r0 top
U197 "WS2812B" LED5050 78.725,18.425 r0 top
U198 "WS2812B" LED5050 85.425,18.425 r0 top
U199 "WS2812B" LED5050 92.125,18.425 r0 top
U200 "WS2812B" LED5050 98.825,18.425 r0 top
U201 "WS2812B" LED5050 38.525,11.725 r0 top
U202 "WS2812B" LED5050 45.225,11.725 r0 top
U203 "WS2812B" LED5050 51.925,11.725 r0 top
U204 "WS2812B" LED5050 58.625,11.725 r0 top
U205 "WS2812B" LED5050 65.325,11.725 r0 top
U206 "WS2812B" LED5050 72.025,11.725 r0 top
U207 "WS2812B" LED5050 78.725,11.725 r0 top
U208 "WS2812B" LED5050 85.425,11.725 r0 top
U209 "WS2812B" LED5050 92.125,11.725 r0 top
U210 "WS2812B" LED5050 98.825,11.725 r0 top
U211 "WS2812B" LED5050 38.525,5.025 r0 top
U212 "WS2812B" LED5050 45.225,5.025 r0 top
U213 "WS2812B" LED5050 51.925,5.025 r0 top
U214 "WS2812B" LED5050 58.625,5.025 r0 top
U215 "WS2812B" LED5050 65.325,5.025 r0 top
U216 "WS2812B" LED5050 72.025,5.025 r0 top
U217 "WS2812B" LED5050 78.725,5.025 r0 top
U218 "WS2812B" LED5050 85.425,5.025 r0 top
U219 "WS2812B" LED5050 92.125,5.025 r0 top
U220 "WS2812B" LED5050 98.825,5.025 r0 top
U221 "TC1186-3.3VCT713" SOT-23-CT5_L 108.875,19.262 r0 top
U222 "ATSAMC21J18A-AUT" TQFP64 22.612,30.15 r0 top

## Footprints (in the part's own frame and the unit in brackets; to place one, negate y for a bottom-side part, rotate by r counter-clockwise, add the part's x,y. Pads: shape width x height; smd on the part's side, far side on the other; paste and mask are expansions set on the pad)
62201021121 [mm] "Pin Header, pitch 1.27 mm, THT, Vertical, dual row, 10p"
  round 1.05 hole 0.7 mask+0.06: 1(-2.54,-0.635) 2(-2.54,0.635) 3(-1.27,-0.635) 4(-1.27,0.635) 5(0,-0.635) 6(0,0.635) 7(1.27,-0.635) 8(1.27,0.635) 9(2.54,-0.635) 10(2.54,0.635)
  silkscreen extent -3.32,-1.78 3.32,1.78, body extent -3.17,-1.7 3.18,1.7, height 5.33
AO-SOT-23-3L_V [mm] "SOT23, 3-Leads, Body 3.1x1.8mm, Pitch 0.95mm"
  rect 0.8x0.8 smd: 1(-1.2,0.95) 2(-1.2,-0.95) 3(1.2,0)
  silkscreen extent -1.32,-1.55 0.9,2.02, body extent -1.5,-1.55 1.5,1.55, height 1.25
CAPC1608X09M [mm] "Chip Capacitor, 2-Leads, Body 1.60x0.80mm, IPC Low Density"
  rect 1.3x1.05 smd: 1(-0.8,0) 2(0.8,0)
  body extent -0.85,-0.45 0.85,0.45, height 0.9
CAPC2012X14M [mm] "Chip Capacitor 0805, 2-Leads, Body 2.00x1.25mm, IPC Low Density"
  rect 1.45x1.55 smd: 1(-0.925,0) 2(0.925,0)
  body extent -1.1,-0.72 1.1,0.72, height 1.45
HDR2X4 [mm] "Connector; Header; 4x2 Position"
  rect 1.5x1.5 hole 0.9: 1(0,0)
  round 1.5 hole 0.9: 2(0,2.54) 3(2.54,0) 4(2.54,2.54) 5(5.08,0) 6(5.08,2.54) 7(7.62,0) 8(7.62,2.54)
  silkscreen extent -1.27,-1.27 8.89,3.81
JST-B2B-PH-K-S_V [mm] "Connector, 2-Leads, Body 5.9x4.5mm, Pitch 2mm"
  rect 1.5x1.5 hole 1: 1(-1,0.55)
  round 1.5 hole 1: 2(1,0.55)
  silkscreen extent -2.95,-2.25 2.95,2.25, body extent -2.95,-2.25 2.95,2.25, height 6
LED5050 [mm] "SMD, 4-Leads, Body 5x5mm"
  rect 1.5x0.9 smd: 1(-2.45,1.65) 2(-2.45,-1.65) 3(2.45,-1.65) 4(2.45,1.65)
  silkscreen extent -3.87,-2.5 2.5,2.5, body extent -2.67,-2.5 2.73,2.5, height 1.68
RESC1608X06M [mm] "Chip Resistor, 2-Leads, Body 1.60x0.80mm, IPC Low Density"
  rect 1.15x1 smd: 1(-0.825,0) 2(0.825,0)
  body extent -0.85,-0.45 0.85,0.45, height 0.55
SOT-23-CT5_L [mm] "SOT23, 5-Leads, Body 2.9x1.7mm, Pitch 0.95mm, Lead Span 2.8mm, IPC High Density"
  rect 0.9x0.65 smd: 1(-1.2,0.95) 2(-1.2,0) 3(-1.2,-0.95) 4(1.2,-0.95) 5(1.2,0.95)
  silkscreen extent -1.32,-1.55 0.35,1.95, body extent -0.9,-1.55 0.9,1.55, height 1.45
TQFP64 [mm] "TSQFP, 64-Leads, Body 10.00x10.00mm, Pitch 0.50mm, IPC Low Density"
  oval 1.6x0.35 smd: 1(-5.8,3.75) 2(-5.8,3.25) 3(-5.8,2.75) 4(-5.8,2.25) 5(-5.8,1.75) 6(-5.8,1.25) 7(-5.8,0.75) 8(-5.8,0.25) 9(-5.8,-0.25) 10(-5.8,-0.75) 11(-5.8,-1.25) 12(-5.8,-1.75) 13(-5.8,-2.25) 14(-5.8,-2.75) 15(-5.8,-3.25) 16(-5.8,-3.75) 33(5.8,-3.75) 34(5.8,-3.25) 35(5.8,-2.75) 36(5.8,-2.25) 37(5.8,-1.75) 38(5.8,-1.25) 39(5.8,-0.75) 40(5.8,-0.25) 41(5.8,0.25) 42(5.8,0.75) 43(5.8,1.25) 44(5.8,1.75) 45(5.8,2.25) 46(5.8,2.75) 47(5.8,3.25) 48(5.8,3.75)
  oval 0.35x1.6 smd: 17(-3.75,-5.8) 18(-3.25,-5.8) 19(-2.75,-5.8) 20(-2.25,-5.8) 21(-1.75,-5.8) 22(-1.25,-5.8) 23(-0.75,-5.8) 24(-0.25,-5.8) 25(0.25,-5.8) 26(0.75,-5.8) 27(1.25,-5.8) 28(1.75,-5.8) 29(2.25,-5.8) 30(2.75,-5.8) 31(3.25,-5.8) 32(3.75,-5.8) 49(3.75,5.8) 50(3.25,5.8) 51(2.75,5.8) 52(2.25,5.8) 53(1.75,5.8) 54(1.25,5.8) 55(0.75,5.8) 56(0.25,5.8) 57(-0.25,5.8) 58(-0.75,5.8) 59(-1.25,5.8) 60(-1.75,5.8) 61(-2.25,5.8) 62(-2.75,5.8) 63(-3.25,5.8) 64(-3.75,5.8)
  silkscreen extent -5.92,-4.6 4.6,4.6, body extent -6,-6 6,6, height 1.2

## Part data
C1 C2 C6: library part CL21B105KBFNNNE_1, "MULTILAYER CERAMIC CAPACITORS MLCC - SMD/SMT 1UF 50V 0805 ROHS", LCSC Part #=C28323
C3: library part CL21A106KAYNNNE, "MULTILAYER CERAMIC CAPACITORS MLCC - SMD/SMT 10UF 25V 0805 ROHS", LCSC Part #=C15850
C4 C5: library part CC0603KRX7R9BB104_1, "MULTILAYER CERAMIC CAPACITORS MLCC - SMD/SMT 100NF 50V 0603 ROHS", LCSC Part #=C14663
P1: library part CMP-2000-05162-1, "Male Header, Pitch 2 mm, 1 x 2 Position, Height 6 mm, Tail Length 3.4 mm, -25 to 85 degC, RoHS, Bulk", Manufacturer=JST, Datasheet URL=http://datasheet.octopart.com/B2B-PH-K-S%28LF%29%28SN%29-JST-datasheet-8324864.pdf, Datasheet Version=Nov-08, Manufacturer URL=http://www.jst.com/home2.html, No of Positions=2, Pitch=2mm, Style/Orientation=StraightHeader/Plug, Termination=Crimp, Type=ShroudedHeader
P2: library part CMP-1502-00948-1, "THT Vertical Pin Header WR-PHD, Pitch 1.27 mm, Dual Row, 10 pins", Contact Resistance=20mOhm, Manufacturer="Wurth Elektronik", Operating Temperature=-40to105degC, Rated Current=1A, Withstanding Voltage=500VAC, Working Voltage=100VAC, Datasheet URL=https://katalog.we-online.de/em/datasheet/62201021121.pdf, Gender=Male, Manufacturer URL=http://www.we-online.de, Mounting Technology=THT, Orientation=Vertical, Package Reference=62201021121, Packaging=Box, Part Number=62201021121, Pin Number=10, Pitch=1.27mm, Publisher=WurthElektronik, Row Number=Dual
P3: "Header, 4-Pin, Dual row", LatestRevisionDate=17-Jul-2002, LatestRevisionNote="Re-released for DXP Platform.", Publisher="Altium Limited"
Q1 Q2 Q3: library part CMP-2000-05778-1, "P-Channel MOSFET, 30 V, 4 A, -55 to 150 degC, 3-Pin SOT-23-3L, RoHS, Tape and Reel", Continuous Drain Current=4A, Drain-Source On-Volt=30V, Frequency (Max)=NotRequiredMHz, Gate-Source Voltage (Max)=?12V, Manufacturer="Alpha and Omega", Operating Temp Range=-55Cto150C, Operating Temperature Classification=Military, Output Power (Max)=NotRequiredW, Package Description="3-Pin Small Outline Transistor, Body 2.95 x 1.6 mm, Pitch 0.95 mm", Package Reference=SOT-23-3L, Package Type=SOT-23, Power Dissipation=1.4W, Power Gain=NotRequireddB, Channel Mode=Enhancement, Datasheet URL=http://www.aosmd.com/res/data_sheets/AO3401A.pdf, Datasheet Version="Rev. 3, 03/2011", Drain Current (Max)=4A, Drain Efficiency=NotRequired%, Drain-Source On-Res=0.044ohm, Manufacturer URL=http://www.aosmd.com/, Mounting=SurfaceMount, Mounting Technology=SurfaceMount, Noise Figure=NotRequireddB, Number of  Elements=1, Package URL=http://www.aosmd.com/res/packaging_information/SOT-23-3L.pdf, Pin Count=3, Polarity=P, Rad Hardened=No, Type=PowerMOSFET
R1 R2 R3 R4 R5 R6 R7 R8: library part 0603WAF3300T5E, "CHIP RESISTOR - SURFACE MOUNT 330OHMS ±1% 1/10W 0603 ROHS", LCSC Part #=C23138
U1 U2 U3 U4 U5 U6 U7 U8 U9 U10 U11 U12 U13 U14 U15 U16 U17 U18 U19 U20 U21 U22 U23 U24 U25 U26 U27 U28 U29 U30 U31 U32 U33 U34 U35 U36 U37 U38 U39 U40 U41 U42 U43 U44 U45 U46 U47 U48 U49 U50 U51 U52 U53 U54 U55 U56 U57 U58 U59 U60 U61 U62 U63 U64 U65 U66 U67 U68 U69 U70 U71 U72 U73 U74 U75 U76 U77 U78 U79 U80 U81 U82 U83 U84 U85 U86 U87 U88 U89 U90 U91 U92 U93 U94 U95 U96 U97 U98 U99 U100 U101 U102 U103 U104 U105 U106 U107 U108 U109 U110 U111 U112 U113 U114 U115 U116 U117 U118 U119 U120 U121 U122 U123 U124 U125 U126 U127 U128 U129 U130 U131 U132 U133 U134 U135 U136 U137 U138 U139 U140 U141 U142 U143 U144 U145 U146 U147 U148 U149 U150 U151 U152 U153 U154 U155 U156 U157 U158 U159 U160 U161 U162 U163 U164 U165 U166 U167 U168 U169 U170 U171 U172 U173 U174 U175 U176 U177 U178 U179 U180 U181 U182 U183 U184 U185 U186 U187 U188 U189 U190 U191 U192 U193 U194 U195 U196 U197 U198 U199 U200 U201 U202 U203 U204 U205 U206 U207 U208 U209 U210 U211 U212 U213 U214 U215 U216 U217 U218 U219 U220: library part CMP-2000-05026-1, "Intelligent Control LED Integrated Light Source, 3.5 to 5.3 V, -25 to 80 degC, 4-Pin SMD, RoHS, Tape and Reel", Color=Red,Green,Blue(RGB), LCSC Part #=C114586, Manufacturer=Adafruit-Industries-LLC, Package Description="4-Pin Surface Mount Device, Body 5 x 5 mm", Package Reference=1655, Category=Optoelectronics, Configuration=Discrete, Controller Type=-, Datasheet URL=http://datasheet.octopart.com/ADA1655-Adafruit-Industries-datasheet-32028139.pdf, Datasheet Version=May-13, Family=Addressable,Specialty, Interface=-, Manufacturer URL=https://www.adafruit.com/, Mounting Type=SurfaceMount, Number of LEDs=10, Series=Neopixel, Size / Dimension=5.00mmLx5.00mmW, Utilized LED=WS2812(5050)
U221: library part CMP-0136-00555-1, "50 mA, 100 mA and 150 mA CMOS LDOs with Shutdown and Active-Low Error Output, 5-Pin SOT-23, Extended Temperature, Tape and Reel", Code_IPC=SOT23-5, DatasheetVersion="revD, Feb-2007", PackageDescription="5-Lead Plastic Small Outline Transistor (CT) [SOT-23]", PackageReference=SOT-23-CT5, PackageVersion="revBB, Aug-2009"
U222: library part CMP-06276-000065-1, "IC MCU 32BIT 256KB FLASH 64TQFP", Case/Package=TQFP, Frequency=48MHz, Max Operating Temperature=85°C, Min Operating Temperature=-40°C, Core Architecture=ARM, Interface=I2C, Memory Size=256KB, Memory Type=FLASH, Number of I/Os=52, Oscillator Type=Internal, Packaging="Cut Tape", Peripherals="Brown-out Detect/Reset"

## Free pads (board coordinates)
  rect 1.15x1 smd far side: *(10.913,92.125) *(11.75,65.325) *(11.75,78.725) *(12.562,92.125) *(12.588,51.925) *(13.4,65.325) *(13.4,78.725) *(14.238,51.925) *(45.25,11.725) *(45.25,18.425) *(45.25,25.125) *(45.25,31.825) *(45.25,38.525) *(46.9,11.725) *(46.9,18.425) *(46.9,25.125) *(46.9,31.825) *(46.9,38.525)
  round 1.152 hole 1.152 unplated paste+1.152 mask+0.148: *(31.825,6.7) *(106.362,10.05) *(132.325,37.687)
  oval 45x1.25 hole 1 slot 44.5 at 0 deg: *(38.525,48.575) *(38.525,55.275) *(38.525,61.975) *(38.525,68.675) *(38.525,75.375) *(38.525,82.075) *(38.525,88.775) *(98.825,48.575) *(98.825,55.275) *(98.825,61.975) *(98.825,68.675) *(98.825,75.375) *(98.825,82.075) *(98.825,88.775)

## Via types
v1: diameter 1, hole 0.5, Top Layer to Bottom Layer, tented both sides, 221 vias
v2: diameter 1, hole 0.5, Top Layer to Bottom Layer, 33 vias
v3: diameter 1.27, hole 0.711, Top Layer to Bottom Layer, 8 vias
v4: diameter 0.45, hole 0.2, Top Layer to Bottom Layer, 7 vias
v5: diameter 1, hole 0.5, Top Layer to Bottom Layer, tented top, 5 vias
v6: diameter 0.45, hole 0.2, Top Layer to Bottom Layer, tented top, 3 vias

## Nets (pads, with @x,y where several pads share a name; then routed paths per layer and width w, separated by ;. In a path a pad name is that pad's centre, name@x,y a point inside that pad or via, vN(x,y) a via of type N, cw(c..) or ccw(c..) an arc to the next point about the centre after c; other vN are vias at no path point)
+3.3V: C2.1 P3.2 U221.5 | length 15.2
  Top Layer w0.381: P3.2@108.038,31.825 109.8,30.063 C2.1@109.8,25.963 111.387,25.963 112.225,25.125 112.225,22.238 110.2,20.213 U221.5@110.075,20.212
GND: C1.2 C2.2 C3.2 C4.2 C5.2 C6.2 P1.1 P2.3 P2.5 P3.1 Q1.1 Q2.1 Q3.1 U1.3 U2.3 U3.3 U4.3 U5.3 U6.3 U7.3 U8.3 U9.3 U10.3 U11.3 U12.3 U13.3 U14.3 U15.3 U16.3 U17.3 U18.3 U19.3 U20.3 U21.3 U22.3 U23.3 U24.3 U25.3 U26.3 U27.3 U28.3 U29.3 U30.3 U31.3 U32.3 U33.3 U34.3 U35.3 U36.3 U37.3 U38.3 U39.3 U40.3 U41.3 U42.3 U43.3 U44.3 U45.3 U46.3 U47.3 U48.3 U49.3 U50.3 U51.3 U52.3 U53.3 U54.3 U55.3 U56.3 U57.3 U58.3 U59.3 U60.3 U61.3 U62.3 U63.3 U64.3 U65.3 U66.3 U67.3 U68.3 U69.3 U70.3 U71.3 U72.3 U73.3 U74.3 U75.3 U76.3 U77.3 U78.3 U79.3 U80.3 U81.3 U82.3 U83.3 U84.3 U85.3 U86.3 U87.3 U88.3 U89.3 U90.3 U91.3 U92.3 U93.3 U94.3 U95.3 U96.3 U97.3 U98.3 U99.3 U100.3 U101.3 U102.3 U103.3 U104.3 U105.3 U106.3 U107.3 U108.3 U109.3 U110.3 U111.3 U112.3 U113.3 U114.3 U115.3 U116.3 U117.3 U118.3 U119.3 U120.3 U121.3 U122.3 U123.3 U124.3 U125.3 U126.3 U127.3 U128.3 U129.3 U130.3 U131.3 U132.3 U133.3 U134.3 U135.3 U136.3 U137.3 U138.3 U139.3 U140.3 U141.3 U142.3 U143.3 U144.3 U145.3 U146.3 U147.3 U148.3 U149.3 U150.3 U151.3 U152.3 U153.3 U154.3 U155.3 U156.3 U157.3 U158.3 U159.3 U160.3 U161.3 U162.3 U163.3 U164.3 U165.3 U166.3 U167.3 U168.3 U169.3 U170.3 U171.3 U172.3 U173.3 U174.3 U175.3 U176.3 U177.3 U178.3 U179.3 U180.3 U181.3 U182.3 U183.3 U184.3 U185.3 U186.3 U187.3 U188.3 U189.3 U190.3 U191.3 U192.3 U193.3 U194.3 U195.3 U196.3 U197.3 U198.3 U199.3 U200.3 U201.3 U202.3 U203.3 U204.3 U205.3 U206.3 U207.3 U208.3 U209.3 U210.3 U211.3 U212.3 U213.3 U214.3 U215.3 U216.3 U217.3 U218.3 U219.3 U220.3 U221.2 U222.7 U222.22 U222.33 U222.47 U222.54 | length 28.4
  Top Layer w0.2: U222.7@16.812,30.9 U222.7@16.834,30.922 ; 21.775,22.612 21.362,23.025 U222.22@21.362,24.35 21.362,25.55 21.775,25.963 ; U222.54@23.862,35.95 23.862,37.262 24.288,37.687 26.129,37.687 ; 26.8,32.663 27.516,33.378 28.391,33.378 U222.47@28.412,33.4 ; C6.2@27.725,39.312 C6.2@27.725,39.362 ; P3.1@105.498,31.825 105.498,28.465 107.95,26.013 C2.2@107.95,25.963 107.95,25.913 108.772,25.091 108.772,24.928 109.175,24.525 109.175,24.075 C1.2@109.8,23.45 ; v2(114.737,36.85) Q1.1@116.413,35.175 ; Q2.1@115.937,29.2 116.52,28.617 116.52,28.177 v2(116.668,28.029) ; Q3.1@119.875,30.512 119.875,31.1 v2(120.6,31.825)
  Top Layer w0.5: v2(104.687,18.425) 105.525,19.263 U221.2@107.675,19.262
  other v1: 48.575,8.375 61.975,8.375 75.375,8.375 88.775,8.375 48.575,21.775 61.975,21.775 75.375,21.775 88.775,21.775 28.475,23.45 20.1,33.5 48.575,35.175 61.975,35.175 75.375,35.175 88.775,35.175 30.15,39.362 18.425,46.9 25.125,46.9 31.825,46.9 112.225,46.9 118.925,46.9 68.675,48.575 128.975,48.575 18.425,53.6 25.125,53.6 31.825,53.6 38.525,53.6 45.225,53.6 51.925,53.6 58.625,53.6 78.725,53.6 85.425,53.6 92.125,53.6 98.825,53.6 105.525,53.6 112.225,53.6 118.925,53.6 8.375,55.275 68.675,55.275 18.425,60.3 25.125,60.3 31.825,60.3 38.525,60.3 45.225,60.3 51.925,60.3 58.625,60.3 78.725,60.3 85.425,60.3 92.125,60.3 98.825,60.3 105.525,60.3 112.225,60.3 118.925,60.3 68.675,61.975 128.975,61.975 18.425,67 25.125,67 31.825,67 38.525,67 45.225,67 51.925,67 58.625,67 78.725,67 85.425,67 92.125,67 98.825,67 105.525,67 112.225,67 118.925,67 8.375,68.675 68.675,68.675 18.425,73.7 25.125,73.7 31.825,73.7 38.525,73.7 45.225,73.7 51.925,73.7 58.625,73.7 78.725,73.7 85.425,73.7 92.125,73.7 98.825,73.7 105.525,73.7 112.225,73.7 118.925,73.7 68.675,75.375 128.975,75.375 18.425,80.4 25.125,80.4 31.825,80.4 38.525,80.4 45.225,80.4 51.925,80.4 58.625,80.4 78.725,80.4 85.425,80.4 92.125,80.4 98.825,80.4 105.525,80.4 112.225,80.4 118.925,80.4 8.375,82.075 68.675,82.075 18.425,87.1 25.125,87.1 31.825,87.1 38.525,87.1 45.225,87.1 51.925,87.1 58.625,87.1 78.725,87.1 85.425,87.1 92.125,87.1 98.825,87.1 105.525,87.1 112.225,87.1 118.925,87.1 68.675,88.775 128.975,88.775 65.325,93.8
  other v2: 11.725,41.875 118.925,41.875
NetC6_1: C6.1 U222.55 | length 4.9
  Top Layer w0.2: U222.55@23.362,35.95 23.384,35.972 23.384,37.622 24.45,38.687 25.25,38.687 25.875,39.312 C6.1@25.875,39.362
NetP1_2: P1.2 Q1.3 Q2.3 Q3.3 | length 29.7
  Top Layer w0.5: Q2.3@113.537,30.15 113.406,30.019 113.406,29 113.062,28.656 113.062,27.312 P1.2@116.925,23.45 P1.2@116.925,23.591 ; Q1.3@118.813,34.225 120.713,34.225 122.275,32.663 122.275,28.475 120.6,26.8 120.134,26.8 P1.2@116.925,23.591 ; Q3.3@118.925,28.112 118.088,27.275 118.088,26.8 116.925,25.637 P1.2@116.925,23.591
NetP3_3: P3.3 U222.37 | length 100.4
  Top Layer w0.2: U222.37@28.412,28.4 30.188,28.4
  Top Layer w0.254: 30.188,28.4 33.372,28.4 33.447,28.475 v4(33.5,28.475)
  Bottom Layer w0.254: v4(33.5,28.475) 34.439,29.414 34.439,41.976 36.013,43.55 104.773,43.55 105.498,42.825 105.498,40.973 104.417,39.892 104.417,36.458 105.498,35.377 P3.3@105.498,34.365
NetP3_4: P3.4 U222.41 | length 105.1
  Top Layer w0.2: U222.41@28.412,30.4 30.188,30.4
  Top Layer w0.254: 30.188,30.4 30.806,30.4 30.831,30.425 31.762,30.425 31.842,30.345 v4(31.896,30.345)
  Bottom Layer w0.254: v4(31.896,30.345) 31.869,30.371 31.869,42.136 35.823,46.09 104.962,46.09 108.038,43.015 108.038,40.973 109.118,39.892 109.118,38.998 108.485,38.365 107.97,38.365 106.957,37.352 106.957,36.458 108.038,35.377 P3.4@108.038,34.365
NetP3_5: P3.5 U222.42 | length 97.4
  Top Layer w0.2: U222.42@28.412,30.9 30.188,30.9
  Top Layer w0.254: 30.188,30.9 33.041,30.9 v4(33.426,31.286)
  Bottom Layer w0.254: v4(33.426,31.286) 33.426,42.257 35.634,44.464 105.151,44.464 106.412,43.204 106.412,40.058 106.578,39.892 106.578,38.998 105.498,37.917 P3.5@105.498,36.905
NetP3_6: P3.6 U222.39 | length 103.7
  Top Layer w0.2: U222.39@28.412,29.4 30.188,29.4
  Top Layer w0.254: 30.188,29.4 30.194,29.406 31.244,29.406 v4(31.25,29.412)
  Bottom Layer w0.254: v4(31.25,29.412) 31.25,42.164 35.634,46.547 105.151,46.547 108.495,43.204 108.495,41.162 109.575,40.082 109.575,38.808 108.674,37.908 108.159,37.908 108.038,37.786 P3.6@108.038,36.905
NetP3_7: P3.7 U222.40 | length 94.5
  Top Layer w0.2: U222.40@28.412,29.9 30.188,29.9
  Top Layer w0.254: 30.188,29.9 30.953,29.9 31.021,29.968 31.488,29.968 31.666,29.79 33.087,29.79 33.447,30.15 v4(33.5,30.15)
  Bottom Layer w0.254: v4(33.5,30.15) 33.982,30.632 33.982,42.166 35.823,44.007 104.962,44.007 105.955,43.015 105.955,40.783 105.498,40.326 P3.7@105.498,39.445
NetP3_8: P3.8 U222.38 | length 98.5
  Top Layer w0.2: U222.38@28.412,28.9 30.188,28.9
  Top Layer w0.254: 30.188,28.9 30.978,28.9 31.021,28.857 32.232,28.857 32.609,29.234 v4(32.663,29.234)
  Bottom Layer w0.254: v4(32.663,29.234) 32.663,42.283 36.013,45.633 104.773,45.633 107.58,42.825 107.58,40.783 108.038,40.326 P3.8@108.038,39.445
NetR1_1: R1.1 U1.4 | length 68.7
  Top Layer w0.254: v2(5.025,92.125) 5.525,92.125 7.175,93.775 U1.4@7.475,93.775 ; v2(5.863,35.175) R1.1@9.352,35.175
  Bottom Layer w0.254: v2(5.025,92.125) 5.025,91.288 1.675,87.938 1.675,36.013 2.513,35.175 v2(5.863,35.175)
NetR1_2: R1.2 U222.17 | length 15.9
  Top Layer w0.2: R1.2@11.002,35.175 11.077,35.175 11.477,34.775 11.477,34.586 15.075,30.988 15.075,25.125 15.85,24.35 U222.17@18.862,24.35
NetR2_1: R2.1 U81.4 | length 42.3
  Top Layer w0.254: v2(4.187,36.013) 4.187,34.338 8.375,30.15 R2.1@9.352,30.15 ; v2(5.025,65.325) 5.063,65.363 5.563,65.363 7.175,66.975 U81.4@7.475,66.975
  Bottom Layer w0.254: v2(4.187,36.013) 4.187,37.007 3.01,38.185 3.01,63.31 v2(5.025,65.325)
NetR2_2: R2.2 U222.29 | length 25.8
  Top Layer w0.254: R2.2@11.002,30.15 11.077,30.15 11.45,29.777 11.45,29.702 12.562,28.59 12.562,25.125 19.67,18.018 23.45,18.018 24.862,19.43 U222.29@24.862,23.653
NetR3_1: R3.1 U222.25 | length 27.7
  Top Layer w0.2: U222.25@22.862,24.35 22.862,23.2 24.288,21.775
  Top Layer w0.254: R3.1@11.002,32.663 11.077,32.663 11.45,32.289 11.45,32.214 13.4,30.264 13.4,25.125 20.05,18.475 22.612,18.475 24.288,20.15 24.288,21.775
NetR3_2: R3.2 U161.4 | length 42.9
  Top Layer w0.2: 32.452,41.057 32.452,41.018 34.049,39.422 37.386,39.422 38.139,40.175 U161.4@40.975,40.175
  Top Layer w0.254: v2(6.7,33.5) 8.567,33.5 9.404,32.663 R3.2@9.479,32.663 ; v4(17.588,40.2) 18.882,41.495 32.014,41.495 32.452,41.057
  Bottom Layer w0.254: v2(6.7,33.5) 6.7,35.175 10.888,39.362 16.75,39.362 v4(17.588,40.2)
NetR4_1: R4.1 U41.4 | length 58.3
  Top Layer w0.254: v2(2.512,36.85) 2.512,34.477 8.904,28.085 8.904,28.011 9.277,27.637 R4.1@9.352,27.637 ; v2(5.025,78.725) 5.063,78.763 5.562,78.763 7.175,80.375 U41.4@7.475,80.375
  Bottom Layer w0.254: v2(2.512,36.85) 2.512,37.687 2.259,37.941 2.259,75.959 v2(5.025,78.725)
NetR4_2: R4.2 U222.35 | length 38.5
  Top Layer w0.2: R4.2@11.002,27.637 11.002,25.848 19.262,17.588 31.825,17.588 32.663,18.425 32.663,24.021 29.306,27.378 28.434,27.378 U222.35@28.412,27.4
NetR5_1: R5.1 U121.4 | length 23.9
  Top Layer w0.254: v2(4.187,51.925) 5.838,53.575 U121.4@7.475,53.575 ; v2(5.863,37.687) R5.1@9.352,37.687
  Bottom Layer w0.254: v2(4.187,51.925) 3.606,51.343 3.606,38.269 4.188,37.687 v2(5.863,37.687)
NetR5_2: R5.2 U222.43 | length 37.6
  Top Layer w0.2: U222.43@28.412,31.4 30.188,31.4
  Top Layer w0.254: R5.2@11.002,37.687 16.75,37.687 20.1,41.037 31.825,41.037 34.338,38.525 34.338,33.5 32.237,31.4 30.188,31.4
NetR6_2: R6.2 R7.1 | length 2.5
  Top Layer w0.254: R6.2@23.437,16.75 R7.1@25.975,16.75
NetR7_2: R7.2 R8.1 | length 2.5
  Top Layer w0.254: R7.2@27.625,16.75 R8.1@30.175,16.75
NetU1_2: U1.2 U2.4 | length 13
  Top Layer w0.254: U1.2@2.575,90.475 5.736,90.475 7.225,91.964 12.064,91.964 13.875,93.775 U2.4@14.175,93.775
NetU2_2: U2.2 U3.4 | length 13
  Top Layer w0.254: U2.2@9.275,90.475 12.436,90.475 13.925,91.964 18.763,91.964 20.575,93.775 U3.4@20.875,93.775
NetU3_2: U3.2 U4.4 | length 13
  Top Layer w0.254: U3.2@15.975,90.475 19.136,90.475 20.625,91.964 25.464,91.964 27.275,93.775 U4.4@27.575,93.775
NetU4_2: U4.2 U5.4 | length 13
  Top Layer w0.254: U4.2@22.675,90.475 25.836,90.475 27.325,91.964 32.164,91.964 33.975,93.775 U5.4@34.275,93.775
NetU5_2: U5.2 U6.4 | length 13
  Top Layer w0.254: U5.2@29.375,90.475 32.536,90.475 34.025,91.964 38.864,91.964 40.675,93.775 U6.4@40.975,93.775
NetU6_2: U6.2 U7.4 | length 13
  Top Layer w0.254: U6.2@36.075,90.475 39.236,90.475 40.725,91.964 45.564,91.964 47.375,93.775 U7.4@47.675,93.775
NetU7_2: U7.2 U8.4 | length 13
  Top Layer w0.254: U7.2@42.775,90.475 45.936,90.475 47.425,91.964 52.263,91.964 54.075,93.775 U8.4@54.375,93.775
NetU8_2: U8.2 U9.4 | length 13
  Top Layer w0.254: U8.2@49.475,90.475 52.636,90.475 54.125,91.964 58.964,91.964 60.775,93.775 U9.4@61.075,93.775
NetU9_2: U9.2 U10.4 | length 13
  Top Layer w0.254: U9.2@56.175,90.475 59.336,90.475 60.825,91.964 65.664,91.964 67.475,93.775 U10.4@67.775,93.775
NetU10_2: U10.2 U11.4 | length 13
  Top Layer w0.254: U10.2@62.875,90.475 66.036,90.475 67.525,91.964 72.363,91.964 74.175,93.775 U11.4@74.475,93.775
NetU11_2: U11.2 U12.4 | length 13
  Top Layer w0.254: U11.2@69.575,90.475 72.736,90.475 74.225,91.964 79.064,91.964 80.875,93.775 U12.4@81.175,93.775
NetU12_2: U12.2 U13.4 | length 13
  Top Layer w0.254: U12.2@76.275,90.475 79.436,90.475 80.925,91.964 85.764,91.964 87.575,93.775 U13.4@87.875,93.775
NetU13_2: U13.2 U14.4 | length 13
  Top Layer w0.254: U13.2@82.975,90.475 86.136,90.475 87.625,91.964 92.464,91.964 94.275,93.775 U14.4@94.575,93.775
NetU14_2: U14.2 U15.4 | length 13
  Top Layer w0.254: U14.2@89.675,90.475 92.836,90.475 94.325,91.964 99.164,91.964 100.975,93.775 U15.4@101.275,93.775
NetU15_2: U15.2 U16.4 | length 13
  Top Layer w0.254: U15.2@96.375,90.475 99.536,90.475 101.025,91.964 105.863,91.964 107.675,93.775 U16.4@107.975,93.775
NetU16_2: U16.2 U17.4 | length 13
  Top Layer w0.254: U16.2@103.075,90.475 106.236,90.475 107.725,91.964 112.564,91.964 114.375,93.775 U17.4@114.675,93.775
NetU17_2: U17.2 U18.4 | length 13
  Top Layer w0.254: U17.2@109.775,90.475 112.936,90.475 114.425,91.964 119.264,91.964 121.075,93.775 U18.4@121.375,93.775
NetU18_2: U18.2 U19.4 | length 13
  Top Layer w0.254: U18.2@116.475,90.475 119.636,90.475 121.125,91.964 125.964,91.964 127.775,93.775 U19.4@128.075,93.775
NetU19_2: U19.2 U20.4 | length 13
  Top Layer w0.254: U19.2@123.175,90.475 126.336,90.475 127.825,91.964 130.244,91.964 131.733,93.452 134.452,93.452 U20.4@134.775,93.775
NetU20_2: pad.*@10.913,92.125 pad.*@12.562,92.125 U20.2 U21.4 | length 136.8
  Top Layer w0.254: v2(5.025,85.425) 5.219,85.619 5.719,85.619 7.175,87.075 U21.4@7.475,87.075 ; U20.2@129.875,90.475 130.175,90.475 131.631,91.931 132.131,91.931 v3(132.325,92.125)
  Bottom Layer w0.254: v2(5.025,85.425) 5.204,85.604 5.204,86.441 10.888,92.125 v3(132.325,92.125)
NetU21_2: U21.2 U22.4 | length 13
  Top Layer w0.254: U21.2@2.575,83.775 5.736,83.775 7.225,85.263 12.064,85.263 13.875,87.075 U22.4@14.175,87.075
NetU22_2: U22.2 U23.4 | length 13
  Top Layer w0.254: U22.2@9.275,83.775 12.436,83.775 13.925,85.263 18.764,85.263 20.575,87.075 U23.4@20.875,87.075
NetU23_2: U23.2 U24.4 | length 13
  Top Layer w0.254: U23.2@15.975,83.775 19.136,83.775 20.625,85.263 25.464,85.263 27.275,87.075 U24.4@27.575,87.075
NetU24_2: U24.2 U25.4 | length 13
  Top Layer w0.254: U24.2@22.675,83.775 25.836,83.775 27.325,85.263 32.164,85.263 33.975,87.075 U25.4@34.275,87.075
NetU25_2: U25.2 U26.4 | length 13
  Top Layer w0.254: U25.2@29.375,83.775 32.536,83.775 34.025,85.263 38.864,85.263 40.675,87.075 U26.4@40.975,87.075
NetU26_2: U26.2 U27.4 | length 13
  Top Layer w0.254: U26.2@36.075,83.775 39.236,83.775 40.725,85.263 45.564,85.263 47.375,87.075 U27.4@47.675,87.075
NetU27_2: U27.2 U28.4 | length 13
  Top Layer w0.254: U27.2@42.775,83.775 45.936,83.775 47.425,85.263 52.264,85.263 54.075,87.075 U28.4@54.375,87.075
NetU28_2: U28.2 U29.4 | length 13
  Top Layer w0.254: U28.2@49.475,83.775 52.636,83.775 54.125,85.263 58.964,85.263 60.775,87.075 U29.4@61.075,87.075
NetU29_2: U29.2 U30.4 | length 13
  Top Layer w0.254: U29.2@56.175,83.775 59.336,83.775 60.825,85.263 65.664,85.263 67.475,87.075 U30.4@67.775,87.075
NetU30_2: U30.2 U31.4 | length 13
  Top Layer w0.254: U30.2@62.875,83.775 66.036,83.775 67.525,85.263 72.363,85.263 74.175,87.075 U31.4@74.475,87.075
NetU31_2: U31.2 U32.4 | length 13
  Top Layer w0.254: U31.2@69.575,83.775 72.736,83.775 74.225,85.263 79.064,85.263 80.875,87.075 U32.4@81.175,87.075
NetU32_2: U32.2 U33.4 | length 13
  Top Layer w0.254: U32.2@76.275,83.775 79.436,83.775 80.925,85.263 85.764,85.263 87.575,87.075 U33.4@87.875,87.075
NetU33_2: U33.2 U34.4 | length 13
  Top Layer w0.254: U33.2@82.975,83.775 86.136,83.775 87.625,85.263 92.464,85.263 94.275,87.075 U34.4@94.575,87.075
NetU34_2: U34.2 U35.4 | length 13
  Top Layer w0.254: U34.2@89.675,83.775 92.836,83.775 94.325,85.263 99.164,85.263 100.975,87.075 U35.4@101.275,87.075
NetU35_2: U35.2 U36.4 | length 13
  Top Layer w0.254: U35.2@96.375,83.775 99.536,83.775 101.025,85.263 105.864,85.263 107.675,87.075 U36.4@107.975,87.075
NetU36_2: U36.2 U37.4 | length 13
  Top Layer w0.254: U36.2@103.075,83.775 106.236,83.775 107.725,85.263 112.564,85.263 114.375,87.075 U37.4@114.675,87.075
NetU37_2: U37.2 U38.4 | length 13
  Top Layer w0.254: U37.2@109.775,83.775 112.936,83.775 114.425,85.263 119.264,85.263 121.075,87.075 U38.4@121.375,87.075
NetU38_2: U38.2 U39.4 | length 13
  Top Layer w0.254: U38.2@116.475,83.775 119.636,83.775 121.125,85.263 125.964,85.263 127.775,87.075 U39.4@128.075,87.075
NetU39_2: U39.2 U40.4 | length 13
  Top Layer w0.254: U39.2@123.175,83.775 126.336,83.775 127.825,85.263 132.664,85.263 134.475,87.075 U40.4@134.775,87.075
NetU41_2: U41.2 U42.4 | length 13
  Top Layer w0.254: U41.2@2.575,77.075 5.736,77.075 7.225,78.563 12.064,78.563 13.875,80.375 U42.4@14.175,80.375
NetU42_2: U42.2 U43.4 | length 13
  Top Layer w0.254: U42.2@9.275,77.075 12.436,77.075 13.925,78.563 18.763,78.563 20.575,80.375 U43.4@20.875,80.375
NetU43_2: U43.2 U44.4 | length 13
  Top Layer w0.254: U43.2@15.975,77.075 19.136,77.075 20.625,78.563 25.464,78.563 27.275,80.375 U44.4@27.575,80.375
NetU44_2: U44.2 U45.4 | length 13
  Top Layer w0.254: U44.2@22.675,77.075 25.836,77.075 27.325,78.563 32.164,78.563 33.975,80.375 U45.4@34.275,80.375
NetU45_2: U45.2 U46.4 | length 13
  Top Layer w0.254: U45.2@29.375,77.075 32.536,77.075 34.025,78.563 38.864,78.563 40.675,80.375 U46.4@40.975,80.375
NetU46_2: U46.2 U47.4 | length 13
  Top Layer w0.254: U46.2@36.075,77.075 39.236,77.075 40.725,78.563 45.564,78.563 47.375,80.375 U47.4@47.675,80.375
NetU47_2: U47.2 U48.4 | length 13
  Top Layer w0.254: U47.2@42.775,77.075 45.936,77.075 47.425,78.563 52.264,78.563 54.075,80.375 U48.4@54.375,80.375
NetU48_2: U48.2 U49.4 | length 13
  Top Layer w0.254: U48.2@49.475,77.075 52.636,77.075 54.125,78.563 58.964,78.563 60.775,80.375 U49.4@61.075,80.375
NetU49_2: U49.2 U50.4 | length 13
  Top Layer w0.254: U49.2@56.175,77.075 59.336,77.075 60.825,78.563 65.664,78.563 67.475,80.375 U50.4@67.775,80.375
NetU50_2: U50.2 U51.4 | length 13
  Top Layer w0.254: U50.2@62.875,77.075 66.036,77.075 67.525,78.563 72.363,78.563 74.175,80.375 U51.4@74.475,80.375
NetU51_2: U51.2 U52.4 | length 13
  Top Layer w0.254: U51.2@69.575,77.075 72.736,77.075 74.225,78.563 79.064,78.563 80.875,80.375 U52.4@81.175,80.375
NetU52_2: U52.2 U53.4 | length 13
  Top Layer w0.254: U52.2@76.275,77.075 79.436,77.075 80.925,78.563 85.764,78.563 87.575,80.375 U53.4@87.875,80.375
NetU53_2: U53.2 U54.4 | length 13
  Top Layer w0.254: U53.2@82.975,77.075 86.136,77.075 87.625,78.563 92.464,78.563 94.275,80.375 U54.4@94.575,80.375
NetU54_2: U54.2 U55.4 | length 13
  Top Layer w0.254: U54.2@89.675,77.075 92.836,77.075 94.325,78.563 99.164,78.563 100.975,80.375 U55.4@101.275,80.375
NetU55_2: U55.2 U56.4 | length 13
  Top Layer w0.254: U55.2@96.375,77.075 99.536,77.075 101.025,78.563 105.863,78.563 107.675,80.375 U56.4@107.975,80.375
NetU56_2: U56.2 U57.4 | length 13
  Top Layer w0.254: U56.2@103.075,77.075 106.236,77.075 107.725,78.563 112.564,78.563 114.375,80.375 U57.4@114.675,80.375
NetU57_2: U57.2 U58.4 | length 13
  Top Layer w0.254: U57.2@109.775,77.075 112.936,77.075 114.425,78.563 119.264,78.563 121.075,80.375 U58.4@121.375,80.375
NetU58_2: U58.2 U59.4 | length 13
  Top Layer w0.254: U58.2@116.475,77.075 119.636,77.075 121.125,78.563 125.964,78.563 127.775,80.375 U59.4@128.075,80.375
NetU59_2: U59.2 U60.4 | length 13
  Top Layer w0.254: U59.2@123.175,77.075 126.336,77.075 127.825,78.563 130.244,78.563 131.733,80.052 134.452,80.052 U60.4@134.775,80.375
NetU60_2: pad.*@11.75,78.725 pad.*@13.4,78.725 U60.2 U61.4 | length 136.3
  Top Layer w0.254: v2(5.025,72.025) 5.219,72.219 5.719,72.219 7.175,73.675 U61.4@7.475,73.675 ; U60.2@129.875,77.075 130.175,77.075 131.631,78.531 132.131,78.531 v3(132.325,78.725)
  Bottom Layer w0.254: v2(5.025,72.025) 11.725,78.725 v3(132.325,78.725)
NetU61_2: U61.2 U62.4 | length 13
  Top Layer w0.254: U61.2@2.575,70.375 5.736,70.375 7.225,71.863 12.064,71.863 13.875,73.675 U62.4@14.175,73.675
NetU62_2: U62.2 U63.4 | length 13
  Top Layer w0.254: U62.2@9.275,70.375 12.436,70.375 13.925,71.863 18.763,71.863 20.575,73.675 U63.4@20.875,73.675
NetU63_2: U63.2 U64.4 | length 13
  Top Layer w0.254: U63.2@15.975,70.375 19.136,70.375 20.625,71.863 25.464,71.863 27.275,73.675 U64.4@27.575,73.675
NetU64_2: U64.2 U65.4 | length 13
  Top Layer w0.254: U64.2@22.675,70.375 25.836,70.375 27.325,71.863 32.164,71.863 33.975,73.675 U65.4@34.275,73.675
NetU65_2: U65.2 U66.4 | length 13
  Top Layer w0.254: U65.2@29.375,70.375 32.536,70.375 34.025,71.863 38.864,71.863 40.675,73.675 U66.4@40.975,73.675
NetU66_2: U66.2 U67.4 | length 13
  Top Layer w0.254: U66.2@36.075,70.375 39.236,70.375 40.725,71.863 45.564,71.863 47.375,73.675 U67.4@47.675,73.675
NetU67_2: U67.2 U68.4 | length 13
  Top Layer w0.254: U67.2@42.775,70.375 45.936,70.375 47.425,71.863 52.264,71.863 54.075,73.675 U68.4@54.375,73.675
NetU68_2: U68.2 U69.4 | length 13
  Top Layer w0.254: U68.2@49.475,70.375 52.636,70.375 54.125,71.863 58.964,71.863 60.775,73.675 U69.4@61.075,73.675
NetU69_2: U69.2 U70.4 | length 13
  Top Layer w0.254: U69.2@56.175,70.375 59.336,70.375 60.825,71.863 65.664,71.863 67.475,73.675 U70.4@67.775,73.675
NetU70_2: U70.2 U71.4 | length 13
  Top Layer w0.254: U70.2@62.875,70.375 66.036,70.375 67.525,71.863 72.363,71.863 74.175,73.675 U71.4@74.475,73.675
NetU71_2: U71.2 U72.4 | length 13
  Top Layer w0.254: U71.2@69.575,70.375 72.736,70.375 74.225,71.863 79.064,71.863 80.875,73.675 U72.4@81.175,73.675
NetU72_2: U72.2 U73.4 | length 13
  Top Layer w0.254: U72.2@76.275,70.375 79.436,70.375 80.925,71.863 85.764,71.863 87.575,73.675 U73.4@87.875,73.675
NetU73_2: U73.2 U74.4 | length 13
  Top Layer w0.254: U73.2@82.975,70.375 86.136,70.375 87.625,71.863 92.464,71.863 94.275,73.675 U74.4@94.575,73.675
NetU74_2: U74.2 U75.4 | length 13
  Top Layer w0.254: U74.2@89.675,70.375 92.836,70.375 94.325,71.863 99.164,71.863 100.975,73.675 U75.4@101.275,73.675
NetU75_2: U75.2 U76.4 | length 13
  Top Layer w0.254: U75.2@96.375,70.375 99.536,70.375 101.025,71.863 105.863,71.863 107.675,73.675 U76.4@107.975,73.675
NetU76_2: U76.2 U77.4 | length 13
  Top Layer w0.254: U76.2@103.075,70.375 106.236,70.375 107.725,71.863 112.564,71.863 114.375,73.675 U77.4@114.675,73.675
NetU77_2: U77.2 U78.4 | length 13
  Top Layer w0.254: U77.2@109.775,70.375 112.936,70.375 114.425,71.863 119.264,71.863 121.075,73.675 U78.4@121.375,73.675
NetU78_2: U78.2 U79.4 | length 13
  Top Layer w0.254: U78.2@116.475,70.375 119.636,70.375 121.125,71.863 125.964,71.863 127.775,73.675 U79.4@128.075,73.675
NetU79_2: U79.2 U80.4 | length 13
  Top Layer w0.254: U79.2@123.175,70.375 126.336,70.375 127.825,71.863 132.664,71.863 134.475,73.675 U80.4@134.775,73.675
NetU81_2: U81.2 U82.4 | length 13
  Top Layer w0.254: U81.2@2.575,63.675 5.736,63.675 7.225,65.163 12.064,65.163 13.875,66.975 U82.4@14.175,66.975
NetU82_2: U82.2 U83.4 | length 13
  Top Layer w0.254: U82.2@9.275,63.675 12.436,63.675 13.925,65.163 18.763,65.163 20.575,66.975 U83.4@20.875,66.975
NetU83_2: U83.2 U84.4 | length 13
  Top Layer w0.254: U83.2@15.975,63.675 19.136,63.675 20.625,65.163 25.464,65.163 27.275,66.975 U84.4@27.575,66.975
NetU84_2: U84.2 U85.4 | length 13
  Top Layer w0.254: U84.2@22.675,63.675 25.836,63.675 27.325,65.163 32.164,65.163 33.975,66.975 U85.4@34.275,66.975
NetU85_2: U85.2 U86.4 | length 13
  Top Layer w0.254: U85.2@29.375,63.675 32.536,63.675 34.025,65.163 38.864,65.163 40.675,66.975 U86.4@40.975,66.975
NetU86_2: U86.2 U87.4 | length 13
  Top Layer w0.254: U86.2@36.075,63.675 39.236,63.675 40.725,65.163 45.564,65.163 47.375,66.975 U87.4@47.675,66.975
NetU87_2: U87.2 U88.4 | length 13
  Top Layer w0.254: U87.2@42.775,63.675 45.936,63.675 47.425,65.163 52.264,65.163 54.075,66.975 U88.4@54.375,66.975
NetU88_2: U88.2 U89.4 | length 13
  Top Layer w0.254: U88.2@49.475,63.675 52.636,63.675 54.125,65.163 58.964,65.163 60.775,66.975 U89.4@61.075,66.975
NetU89_2: U89.2 U90.4 | length 13
  Top Layer w0.254: U89.2@56.175,63.675 59.336,63.675 60.825,65.163 65.664,65.163 67.475,66.975 U90.4@67.775,66.975